# EAGLE board UART_Block-GiantPanel-v10 (EAGLE 6.6.0), part 1 of 13
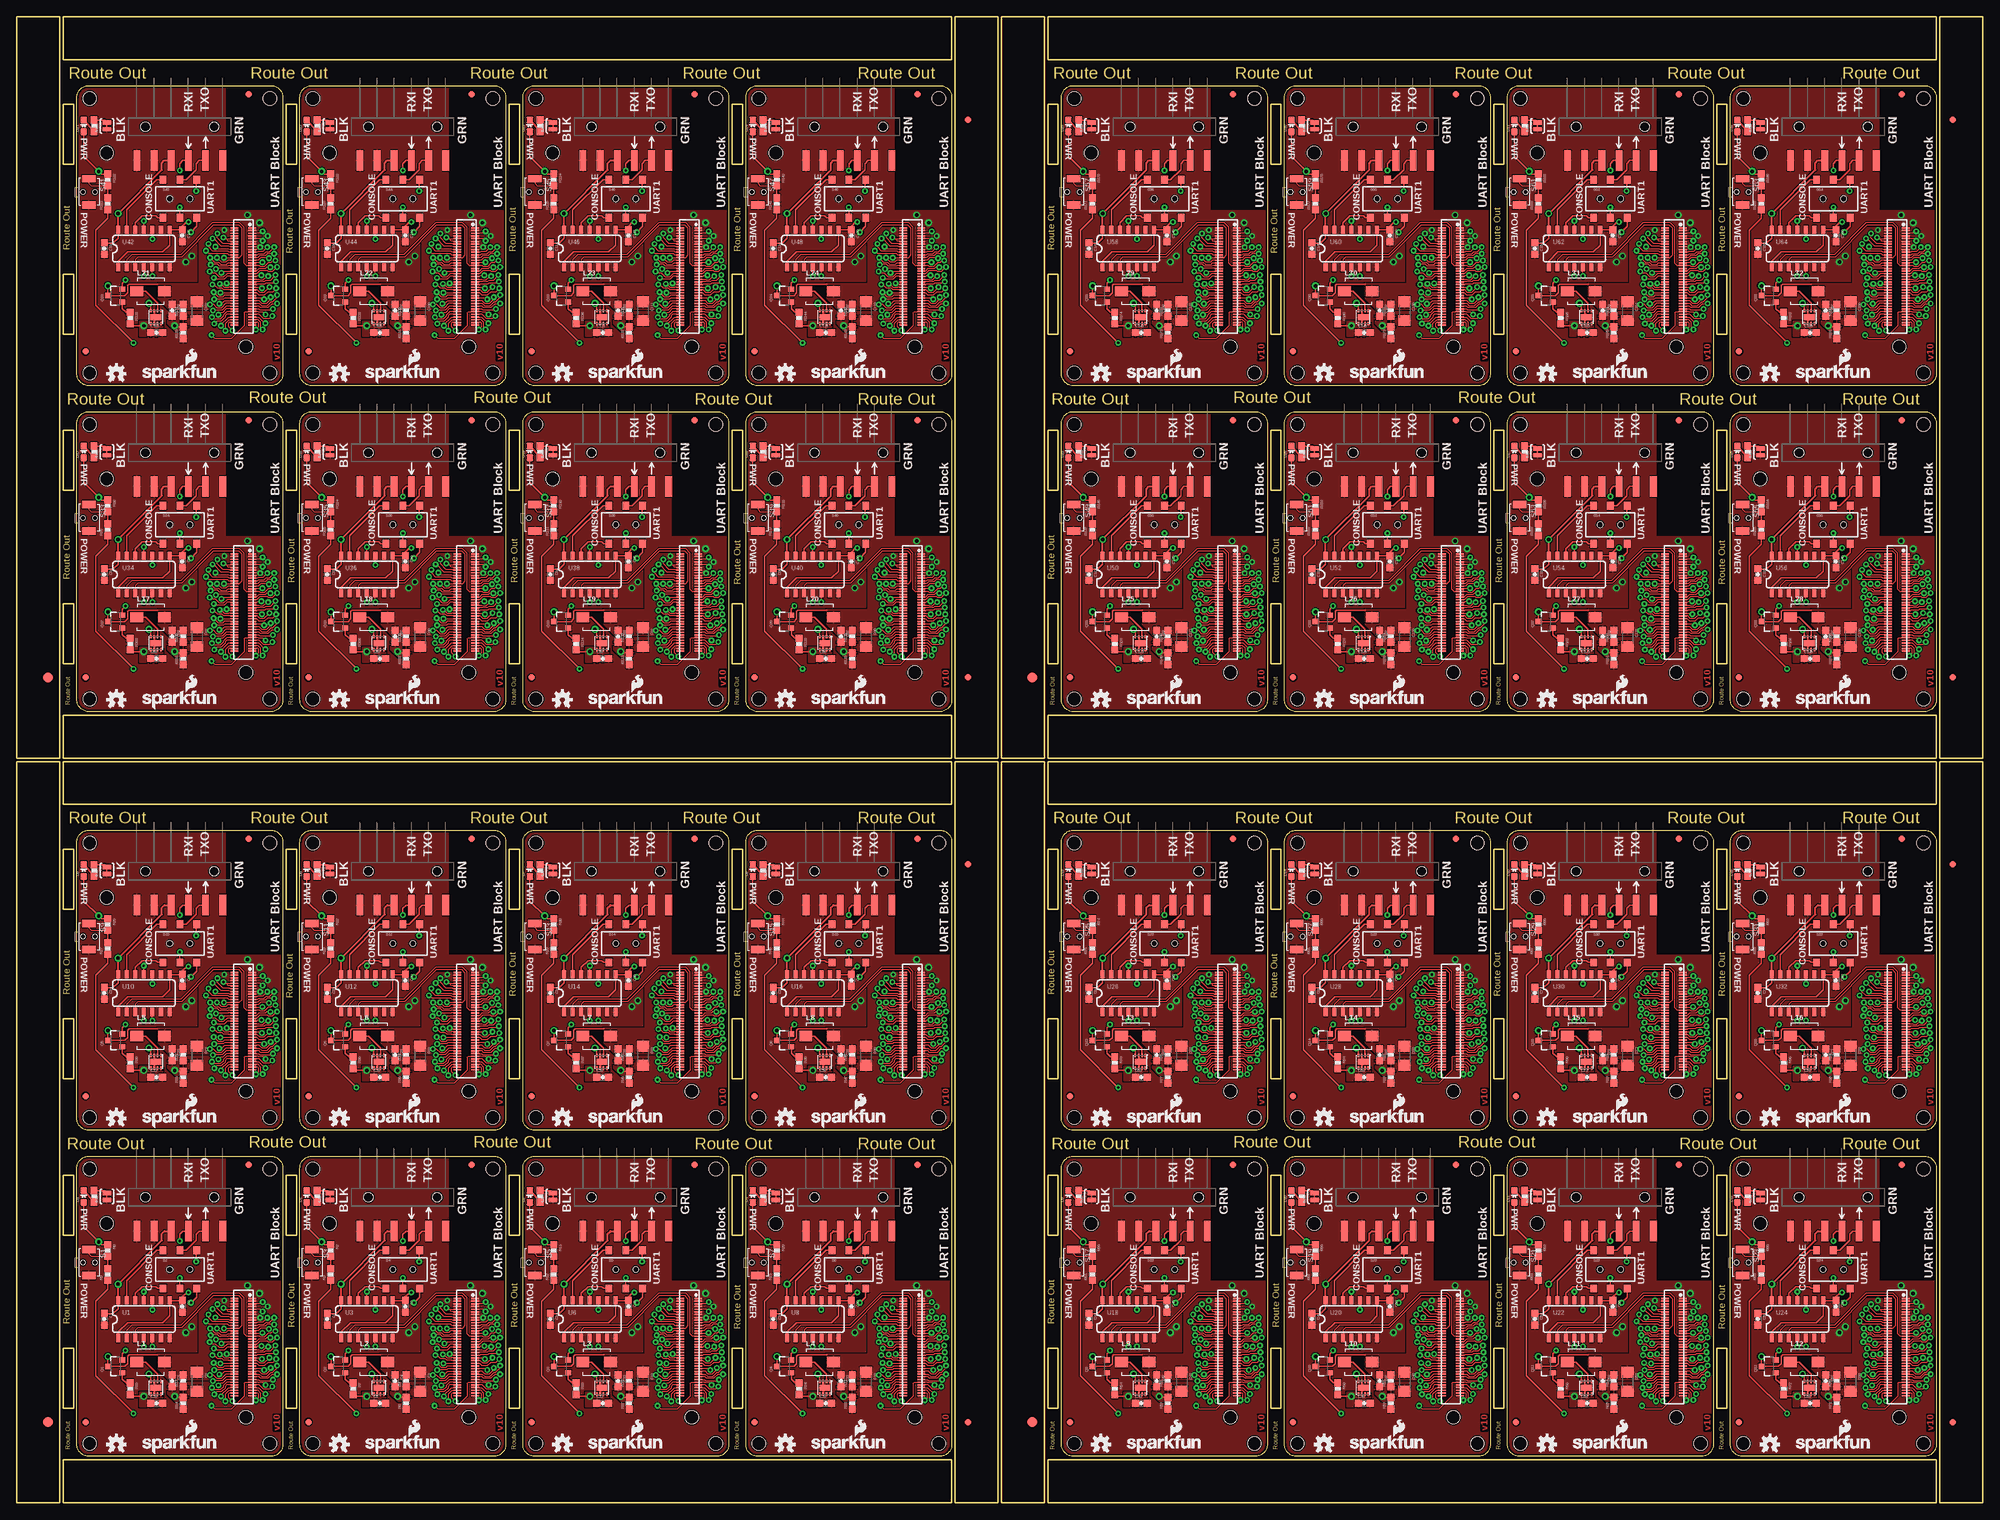
[diagram p0: board, top side]
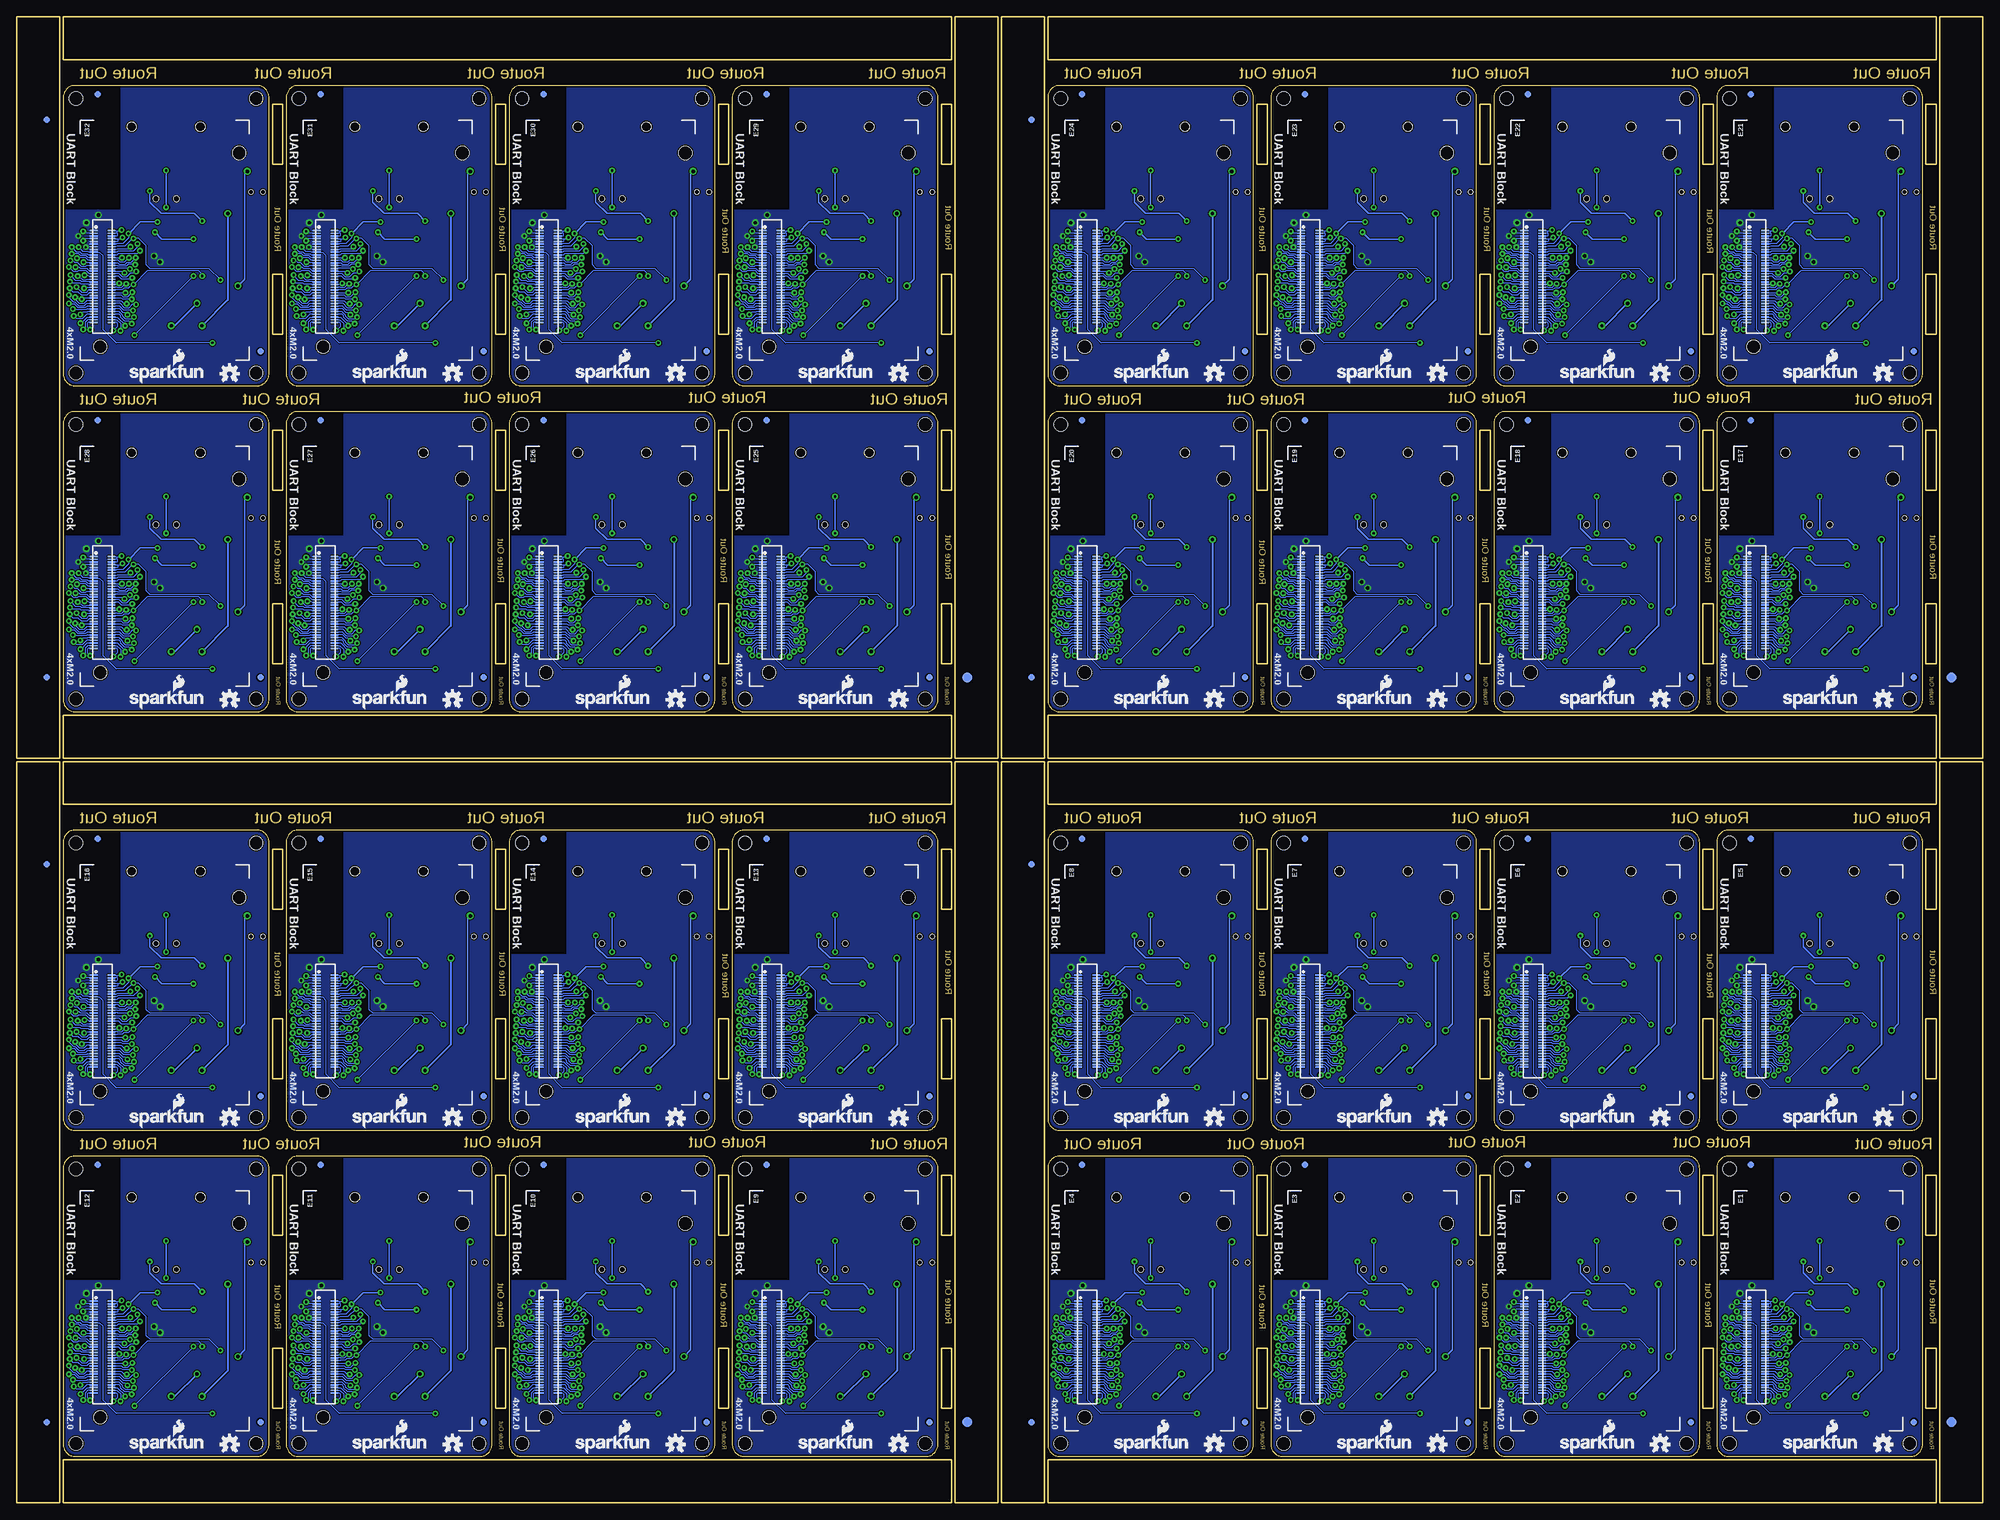
[diagram p1: board, bottom side, seen from below]

Size 291.08 x 219.96 mm. Coordinates in mm from the lower left corner, seen from the top.
Outline: 592 segments
Copper layers (1*16): Top 0.035mm / dielectric 1.5mm / Bottom 0.035mm
Design rules "SparkFun-2-layer *": minimum track width 6mil, minimum drill 13mil, track to track 6mil, track to pad 6mil, pad to pad 6mil, via to via 6mil, smd to smd 6mil, copper to edge 8mil, drill to drill 8mil, minimum pad ring 12mil, minimum via ring 10mil, stop-mask expansion 4mil, vias tented up to drill 20mil, thermal gap 6mil
Holes 2 mm at 37.47,8.76 10.79,8.76 10.79,49.4 37.47,49.4 70.48,8.76 43.81,8.76 43.81,49.4 70.48,49.4 103.5,8.76 76.83,8.76 76.83,49.4 103.5,49.4 136.53,8.76 109.86,8.76 109.86,49.4 136.53,49.4 37.47,57.02 10.79,57.02 10.79,97.66 37.47,97.66 70.48,57.02 43.81,57.02 43.81,97.66 70.48,97.66 103.5,57.02 76.83,57.02 76.83,97.66 103.5,97.66 136.53,57.02 109.86,57.02 109.86,97.66 136.53,97.66 183.26,8.76 156.59,8.76 156.59,49.4 183.26,49.4 216.28,8.76 189.61,8.76 189.61,49.4 216.28,49.4 249.3,8.76 222.63,8.76 222.63,49.4 249.3,49.4 282.32,8.76 255.65,8.76 255.65,49.4 282.32,49.4 183.26,57.02 156.59,57.02 156.59,97.66 183.26,97.66 216.28,57.02 189.61,57.02 189.61,97.66 216.28,97.66 249.3,57.02 222.63,57.02 222.63,97.66 249.3,97.66 282.32,57.02 255.65,57.02 255.65,97.66 282.32,97.66 37.47,119 10.79,119 10.79,159.64 37.47,159.64 70.48,119 43.81,119 43.81,159.64 70.48,159.64 103.5,119 76.83,119 76.83,159.64 103.5,159.64 136.53,119 109.86,119 109.86,159.64 136.53,159.64 37.47,167.26 10.79,167.26 10.79,207.9 37.47,207.9 70.48,167.26 43.81,167.26 43.81,207.9 70.48,207.9 103.5,167.26 76.83,167.26 76.83,207.9 103.5,207.9 136.53,167.26 109.86,167.26 109.86,207.9 136.53,207.9 183.26,119 156.59,119 156.59,159.64 183.26,159.64 216.28,119 189.61,119 189.61,159.64 216.28,159.64 249.3,119 222.63,119 222.63,159.64 249.3,159.64 282.32,119 255.65,119 255.65,159.64 282.32,159.64 183.26,167.26 156.59,167.26 156.59,207.9 183.26,207.9 216.28,167.26 189.61,167.26 189.61,207.9 216.28,207.9 249.3,167.26 222.63,167.26 222.63,207.9 249.3,207.9 282.32,167.26 255.65,167.26 255.65,207.9 282.32,207.9
tRestrict: area 31,33 to 39.4,51.3; area 64,33 to 72.4,51.3; area 97,33 to 105.4,51.3; area 130,33 to 138.4,51.3; area 31,81.3 to 39.4,99.6; area 64,81.3 to 72.4,99.6; area 97,81.3 to 105.4,99.6; area 130,81.3 to 138.4,99.6; area 176.8,33 to 185.2,51.3; area 209.8,33 to 218.2,51.3; area 242.8,33 to 251.2,51.3; area 275.8,33 to 284.2,51.3; 20 more areas; 96 lines
bRestrict: area 31,33 to 39.4,51.3; area 64,33 to 72.4,51.3; area 97,33 to 105.4,51.3; area 130,33 to 138.4,51.3; area 31,81.3 to 39.4,99.6; area 64,81.3 to 72.4,99.6; area 97,81.3 to 105.4,99.6; area 130,81.3 to 138.4,99.6; area 176.8,33 to 185.2,51.3; area 209.8,33 to 218.2,51.3; area 242.8,33 to 251.2,51.3; area 275.8,33 to 284.2,51.3; 20 more areas

## Footprints (pad centres in the part's own frame; a part is rotated, then mirrored left to right if it is on the bottom)
0603-CAP = smd 1.1 x 1: 1 -0.85,0; 2 0.85,0
1206 = smd 1.6 x 1.8: 1 -1.4,0; 2 1.4,0
LED-0603 = smd 1 x 1: A 0,-0.877; C 0,0.877
EDISON_DAUGHTER = smd 1.14 x 0.2: 1 1.98,19.17; 2 4.62,19.17; 3 1.98,18.77; 4 4.62,18.77; 5 1.98,18.37; 6 4.62,18.37; 7 1.98,17.97; 8 4.62,17.97; 9 1.98,17.57; 10 4.62,17.57; 11 1.98,17.17; 12 4.62,17.17; 13 1.98,16.77; 14 4.62,16.77; 15 1.98,16.37; 16 4.62,16.37; 17 1.98,15.97; 18 4.62,15.97; 19 1.98,15.57; 20 4.62,15.57; 21 1.98,15.17; 22 4.62,15.17; 23 1.98,14.77; 24 4.62,14.77; 25 1.98,14.37; 26 4.62,14.37; 27 1.98,13.97; 28 4.62,13.97; 29 1.98,13.57; 30 4.62,13.57; 31 1.98,13.17; 32 4.62,13.17; 33 1.98,12.77; 34 4.62,12.77; 35 1.98,12.37; 36 4.62,12.37; 37 1.98,11.97; 38 4.62,11.97; 39 1.98,11.57; 40 4.62,11.57; 41 1.98,11.17; 42 4.62,11.17; 43 1.98,10.77; 44 4.62,10.77; 45 1.98,10.37; 46 4.62,10.37; 47 1.98,9.97; 48 4.62,9.97; 49 1.98,9.57; 50 4.62,9.57; 51 1.98,9.17; 52 4.62,9.17; 53 1.98,8.77; 54 4.62,8.77; 55 1.98,8.37; 56 4.62,8.37; 57 1.98,7.97; 58 4.62,7.97; 59 1.98,7.57; 60 4.62,7.57; 61 1.98,7.17; 62 4.62,7.17; 63 1.98,6.77; 64 4.62,6.77; 65 1.98,6.37; 66 4.62,6.37; 67 1.98,5.97; 68 4.62,5.97; 69 1.98,5.57; 70 4.62,5.57 | hole 2: 23.53,30.67; 2.93,1.98
FIDUCIAL-1.5X3 = smd 1.5 x 1.5: 1 0,0
FIDUCIAL-1X2 = smd 1 x 1: 1 0,0
1X06-SMD = smd 1 x 3: 1 -6.35,5; 2 -3.81,5; 3 -1.27,5; 4 1.27,5; 5 3.81,5; 6 6.35,5 | hole 1.4: -5.08,0; 5.08,0
INDUCTOR-SRP4020 = smd 1.9 x 1.5: P$1 -2.05,0; P$2 2.05,0
SOT23-3 = smd 0.8 x 0.9: 1 -0.95,-1; 2 0.95,-1; 3 0,1.1
0603-RES = smd 1.1 x 1: 1 -0.85,0; 2 0.85,0
TACTILE_SWITCH-SMD-RIGHT-ANGLE = smd 1.1 x 2: 1 -1.95,0; 2 1.95,0 | hole 0.7: 0,0.9; 0,-0.9
AYZ0202 = smd 1 x 1.15: 1 -2.5,2.825; 2 0,2.825; 3 2.5,2.825; 4 -2.5,-2.825; 5 0,-2.825; 6 2.5,-2.825 | hole 0.85: 1.5,0; -1.5,0
PAD-JUMPER-2-NC_BY_TRACE_YES_SILK = smd 0.635 x 1.27: 1 -0.508,0; 2 0.508,0
SO14 = smd 0.6 x 1.2: 1 -3.81,-2.8; 2 -2.54,-2.8; 3 -1.27,-2.8; 4 0,-2.8; 5 1.27,-2.8; 6 2.54,-2.8; 7 3.81,-2.8; 8 3.81,2.8; 9 2.54,2.8; 10 1.27,2.8; 11 0,2.8; 12 -1.27,2.8; 13 -2.54,2.8; 14 -3.81,2.8
WSON-8-PAD = smd 0.25 x 0.5: 1 -0.75,-0.95; 2 -0.25,-0.95; 3 0.25,-0.95; 4 0.75,-0.95; 5 0.75,0.95; 6 0.25,0.95; 7 -0.25,0.95; 8 -0.75,0.95 | smd 1.6 x 0.9: PAD 0,0
DF40C-70DP-0.4(51) = smd 0.2 x 1.14 bottom: 1 6.8,1.32; 2 6.8,-1.32; 3 6.4,1.32; 4 6.4,-1.32; 5 6,1.32; 6 6,-1.32; 7 5.6,1.32; 8 5.6,-1.32; 9 5.2,1.32; 10 5.2,-1.32; 11 4.8,1.32; 12 4.8,-1.32; 13 4.4,1.32; 14 4.4,-1.32; 15 4,1.32; 16 4,-1.32; 17 3.6,1.32; 18 3.6,-1.32; 19 3.2,1.32; 20 3.2,-1.32; 21 2.8,1.32; 22 2.8,-1.32; 23 2.4,1.32; 24 2.4,-1.32; 25 2,1.32; 26 2,-1.32; 27 1.6,1.32; 28 1.6,-1.32; 29 1.2,1.32; 30 1.2,-1.32; 31 0.8,1.32; 32 0.8,-1.32; 33 0.4,1.32; 34 0.4,-1.32; 35 0,1.32; 36 0,-1.32; 37 -0.4,1.32; 38 -0.4,-1.32; 39 -0.8,1.32; 40 -0.8,-1.32; 41 -1.2,1.32; 42 -1.2,-1.32; 43 -1.6,1.32; 44 -1.6,-1.32; 45 -2,1.32; 46 -2,-1.32; 47 -2.4,1.32; 48 -2.4,-1.32; 49 -2.8,1.32; 50 -2.8,-1.32; 51 -3.2,1.32; 52 -3.2,-1.32; 53 -3.6,1.32; 54 -3.6,-1.32; 55 -4,1.32; 56 -4,-1.32; 57 -4.4,1.32; 58 -4.4,-1.32; 59 -4.8,1.32; 60 -4.8,-1.32; 61 -5.2,1.32; 62 -5.2,-1.32; 63 -5.6,1.32; 64 -5.6,-1.32; 65 -6,1.32; 66 -6,-1.32; 67 -6.4,1.32; 68 -6.4,-1.32; 69 -6.8,1.32; 70 -6.8,-1.32; NC1 7.2,1.32; NC2 7.2,-1.32; NC3 -7.2,-1.32; NC4 -7.2,1.32

## Placement (x,y rotation side)
C1  0.1uF  [0603-CAP]  12.95,27.18 270 top
C2  0.1uF  [0603-CAP]  24.51,29.08 270 top
C3  10uF  [1206]  59.69,17.91 270 top
C4  47pF  [0603-CAP]  56.01,18.03 270 top
C5  4.7uF  [0603-CAP]  53.72,14.73 0 top
C6  0.1uF  [0603-CAP]  45.97,27.18 270 top
C7  0.1uF  [0603-CAP]  57.53,29.08 270 top
C8  10uF  [1206]  26.67,17.91 270 top
C9  47pF  [0603-CAP]  22.99,18.03 270 top
C10  4.7uF  [0603-CAP]  20.7,14.73 0 top
C11  10uF  [1206]  92.71,17.91 270 top
C12  47pF  [0603-CAP]  89.03,18.03 270 top
C13  4.7uF  [0603-CAP]  86.74,14.73 0 top
C14  0.1uF  [0603-CAP]  78.99,27.18 270 top
C15  0.1uF  [0603-CAP]  90.55,29.08 270 top
C16  10uF  [1206]  125.73,17.91 270 top
C17  47pF  [0603-CAP]  122.05,18.03 270 top
C18  4.7uF  [0603-CAP]  119.76,14.73 0 top
C19  0.1uF  [0603-CAP]  112.01,27.18 270 top
C20  0.1uF  [0603-CAP]  123.57,29.08 270 top
C21  10uF  [1206]  26.67,66.17 270 top
C22  47pF  [0603-CAP]  22.99,66.29 270 top
C23  4.7uF  [0603-CAP]  20.7,62.99 0 top
C24  0.1uF  [0603-CAP]  12.95,75.44 270 top
C25  0.1uF  [0603-CAP]  24.51,77.34 270 top
C26  10uF  [1206]  59.69,66.17 270 top
C27  47pF  [0603-CAP]  56.01,66.29 270 top
C28  4.7uF  [0603-CAP]  53.72,62.99 0 top
C29  0.1uF  [0603-CAP]  45.97,75.44 270 top
C30  0.1uF  [0603-CAP]  57.53,77.34 270 top
C31  10uF  [1206]  92.71,66.17 270 top
C32  47pF  [0603-CAP]  89.03,66.29 270 top
C33  4.7uF  [0603-CAP]  86.74,62.99 0 top
C34  0.1uF  [0603-CAP]  78.99,75.44 270 top
C35  0.1uF  [0603-CAP]  90.55,77.34 270 top
C36  10uF  [1206]  125.73,66.17 270 top
C37  47pF  [0603-CAP]  122.05,66.29 270 top
C38  4.7uF  [0603-CAP]  119.76,62.99 0 top
C39  0.1uF  [0603-CAP]  112.01,75.44 270 top
C40  0.1uF  [0603-CAP]  123.57,77.34 270 top
C41  10uF  [1206]  172.47,17.91 270 top
C42  47pF  [0603-CAP]  168.78,18.03 270 top
C43  4.7uF  [0603-CAP]  166.5,14.73 0 top
C44  0.1uF  [0603-CAP]  158.75,27.18 270 top
C45  0.1uF  [0603-CAP]  170.31,29.08 270 top
C46  10uF  [1206]  205.49,17.91 270 top
C47  47pF  [0603-CAP]  201.8,18.03 270 top
C48  4.7uF  [0603-CAP]  199.52,14.73 0 top
C49  0.1uF  [0603-CAP]  191.77,27.18 270 top
C50  0.1uF  [0603-CAP]  203.33,29.08 270 top
C51  10uF  [1206]  238.51,17.91 270 top
C52  47pF  [0603-CAP]  234.82,18.03 270 top
C53  4.7uF  [0603-CAP]  232.54,14.73 0 top
C54  0.1uF  [0603-CAP]  224.79,27.18 270 top
C55  0.1uF  [0603-CAP]  236.35,29.08 270 top
C56  10uF  [1206]  271.53,17.91 270 top
C57  47pF  [0603-CAP]  267.84,18.03 270 top
C58  4.7uF  [0603-CAP]  265.56,14.73 0 top
C59  0.1uF  [0603-CAP]  257.81,27.18 270 top
C60  0.1uF  [0603-CAP]  269.37,29.08 270 top
C61  10uF  [1206]  172.47,66.17 270 top
C62  47pF  [0603-CAP]  168.78,66.29 270 top
C63  4.7uF  [0603-CAP]  166.5,62.99 0 top
C64  0.1uF  [0603-CAP]  158.75,75.44 270 top
C65  0.1uF  [0603-CAP]  170.31,77.34 270 top
C66  10uF  [1206]  205.49,66.17 270 top
C67  47pF  [0603-CAP]  201.8,66.29 270 top
C68  4.7uF  [0603-CAP]  199.52,62.99 0 top
C69  0.1uF  [0603-CAP]  191.77,75.44 270 top
C70  0.1uF  [0603-CAP]  203.33,77.34 270 top
C71  10uF  [1206]  238.51,66.17 270 top
C72  47pF  [0603-CAP]  234.82,66.29 270 top
C73  4.7uF  [0603-CAP]  232.54,62.99 0 top
C74  0.1uF  [0603-CAP]  224.79,75.44 270 top
C75  0.1uF  [0603-CAP]  236.35,77.34 270 top
C76  10uF  [1206]  271.53,66.17 270 top
C77  47pF  [0603-CAP]  267.84,66.29 270 top
C78  4.7uF  [0603-CAP]  265.56,62.99 0 top
C79  0.1uF  [0603-CAP]  257.81,75.44 270 top
C80  0.1uF  [0603-CAP]  269.37,77.34 270 top
C81  10uF  [1206]  26.67,128.14 270 top
C82  47pF  [0603-CAP]  22.99,128.27 270 top
C83  4.7uF  [0603-CAP]  20.7,124.97 0 top
C84  0.1uF  [0603-CAP]  12.95,137.41 270 top
C85  0.1uF  [0603-CAP]  24.51,139.32 270 top
C86  10uF  [1206]  59.69,128.14 270 top
C87  47pF  [0603-CAP]  56.01,128.27 270 top
C88  4.7uF  [0603-CAP]  53.72,124.97 0 top
C89  0.1uF  [0603-CAP]  45.97,137.41 270 top
C90  0.1uF  [0603-CAP]  57.53,139.32 270 top
C91  10uF  [1206]  92.71,128.14 270 top
C92  47pF  [0603-CAP]  89.03,128.27 270 top
C93  4.7uF  [0603-CAP]  86.74,124.97 0 top
C94  0.1uF  [0603-CAP]  78.99,137.41 270 top
C95  0.1uF  [0603-CAP]  90.55,139.32 270 top
C96  10uF  [1206]  125.73,128.14 270 top
C97  47pF  [0603-CAP]  122.05,128.27 270 top
C98  4.7uF  [0603-CAP]  119.76,124.97 0 top
C99  0.1uF  [0603-CAP]  112.01,137.41 270 top
C100  0.1uF  [0603-CAP]  123.57,139.32 270 top
C101  10uF  [1206]  26.67,176.4 270 top
C102  47pF  [0603-CAP]  22.99,176.53 270 top
C103  4.7uF  [0603-CAP]  20.7,173.23 0 top
C104  0.1uF  [0603-CAP]  12.95,185.67 270 top
C105  0.1uF  [0603-CAP]  24.51,187.58 270 top
C106  10uF  [1206]  59.69,176.4 270 top
C107  47pF  [0603-CAP]  56.01,176.53 270 top
C108  4.7uF  [0603-CAP]  53.72,173.23 0 top
C109  0.1uF  [0603-CAP]  45.97,185.67 270 top
C110  0.1uF  [0603-CAP]  57.53,187.58 270 top
C111  10uF  [1206]  92.71,176.4 270 top
C112  47pF  [0603-CAP]  89.03,176.53 270 top
C113  4.7uF  [0603-CAP]  86.74,173.23 0 top
C114  0.1uF  [0603-CAP]  78.99,185.67 270 top
C115  0.1uF  [0603-CAP]  90.55,187.58 270 top
C116  10uF  [1206]  125.73,176.4 270 top
C117  47pF  [0603-CAP]  122.05,176.53 270 top
C118  4.7uF  [0603-CAP]  119.76,173.23 0 top
C119  0.1uF  [0603-CAP]  112.01,185.67 270 top
C120  0.1uF  [0603-CAP]  123.57,187.58 270 top
C121  10uF  [1206]  172.47,128.14 270 top
C122  47pF  [0603-CAP]  168.78,128.27 270 top
C123  4.7uF  [0603-CAP]  166.5,124.97 0 top
C124  0.1uF  [0603-CAP]  158.75,137.41 270 top
C125  0.1uF  [0603-CAP]  170.31,139.32 270 top
C126  10uF  [1206]  205.49,128.14 270 top
C127  47pF  [0603-CAP]  201.8,128.27 270 top
C128  4.7uF  [0603-CAP]  199.52,124.97 0 top
C129  0.1uF  [0603-CAP]  191.77,137.41 270 top
C130  0.1uF  [0603-CAP]  203.33,139.32 270 top
C131  10uF  [1206]  238.51,128.14 270 top
C132  47pF  [0603-CAP]  234.82,128.27 270 top
C133  4.7uF  [0603-CAP]  232.54,124.97 0 top
C134  0.1uF  [0603-CAP]  224.79,137.41 270 top
C135  0.1uF  [0603-CAP]  236.35,139.32 270 top
C136  10uF  [1206]  271.53,128.14 270 top
C137  47pF  [0603-CAP]  267.84,128.27 270 top
C138  4.7uF  [0603-CAP]  265.56,124.97 0 top
C139  0.1uF  [0603-CAP]  257.81,137.41 270 top
C140  0.1uF  [0603-CAP]  269.37,139.32 270 top
C141  10uF  [1206]  172.47,176.4 270 top
C142  47pF  [0603-CAP]  168.78,176.53 270 top
C143  4.7uF  [0603-CAP]  166.5,173.23 0 top
C144  0.1uF  [0603-CAP]  158.75,185.67 270 top
C145  0.1uF  [0603-CAP]  170.31,187.58 270 top
C146  10uF  [1206]  205.49,176.4 270 top
C147  47pF  [0603-CAP]  201.8,176.53 270 top
C148  4.7uF  [0603-CAP]  199.52,173.23 0 top
C149  0.1uF  [0603-CAP]  191.77,185.67 270 top
C150  0.1uF  [0603-CAP]  203.33,187.58 270 top
C151  10uF  [1206]  238.51,176.4 270 top
C152  47pF  [0603-CAP]  234.82,176.53 270 top
C153  4.7uF  [0603-CAP]  232.54,173.23 0 top
C154  0.1uF  [0603-CAP]  224.79,185.67 270 top
C155  0.1uF  [0603-CAP]  236.35,187.58 270 top
C156  10uF  [1206]  271.53,176.4 270 top
C157  47pF  [0603-CAP]  267.84,176.53 270 top
C158  4.7uF  [0603-CAP]  265.56,173.23 0 top
C159  0.1uF  [0603-CAP]  257.81,185.67 270 top
C160  0.1uF  [0603-CAP]  269.37,187.58 270 top
D1  BLUE  [LED-0603]  42.93,45.34 0 top
D2  BLUE  [LED-0603]  75.95,45.34 0 top
D3  BLUE  [LED-0603]  9.91,45.34 0 top
D4  BLUE  [LED-0603]  108.97,45.34 0 top
D5  BLUE  [LED-0603]  9.91,93.6 0 top
D6  BLUE  [LED-0603]  42.93,93.6 0 top
D7  BLUE  [LED-0603]  75.95,93.6 0 top
D8  BLUE  [LED-0603]  108.97,93.6 0 top
D9  BLUE  [LED-0603]  155.7,45.34 0 top
D10  BLUE  [LED-0603]  188.72,45.34 0 top
D11  BLUE  [LED-0603]  221.74,45.34 0 top
D12  BLUE  [LED-0603]  254.76,45.34 0 top
D13  BLUE  [LED-0603]  155.7,93.6 0 top
D14  BLUE  [LED-0603]  188.72,93.6 0 top
D15  BLUE  [LED-0603]  221.74,93.6 0 top
D16  BLUE  [LED-0603]  254.76,93.6 0 top
D17  BLUE  [LED-0603]  9.91,155.57 0 top
D18  BLUE  [LED-0603]  42.93,155.57 0 top
D19  BLUE  [LED-0603]  75.95,155.57 0 top
D20  BLUE  [LED-0603]  108.97,155.57 0 top
D21  BLUE  [LED-0603]  9.91,203.84 0 top
D22  BLUE  [LED-0603]  42.93,203.84 0 top
D23  BLUE  [LED-0603]  75.95,203.84 0 top
D24  BLUE  [LED-0603]  108.97,203.84 0 top
D25  BLUE  [LED-0603]  155.7,155.57 0 top
D26  BLUE  [LED-0603]  188.72,155.57 0 top
D27  BLUE  [LED-0603]  221.74,155.57 0 top
D28  BLUE  [LED-0603]  254.76,155.57 0 top
D29  BLUE  [LED-0603]  155.7,203.84 0 top
D30  BLUE  [LED-0603]  188.72,203.84 0 top
D31  BLUE  [LED-0603]  221.74,203.84 0 top
D32  BLUE  [LED-0603]  254.76,203.84 0 top
E1  EDISON_CONNECTOR_FULLMOUNTING_HOLES  [EDISON_DAUGHTER]  36.83,10.67 0 bottom
E2  EDISON_CONNECTOR_FULLMOUNTING_HOLES  [EDISON_DAUGHTER]  69.85,10.67 0 bottom
E3  EDISON_CONNECTOR_FULLMOUNTING_HOLES  [EDISON_DAUGHTER]  102.87,10.67 0 bottom
E4  EDISON_CONNECTOR_FULLMOUNTING_HOLES  [EDISON_DAUGHTER]  135.89,10.67 0 bottom
E5  EDISON_CONNECTOR_FULLMOUNTING_HOLES  [EDISON_DAUGHTER]  36.83,58.93 0 bottom
E6  EDISON_CONNECTOR_FULLMOUNTING_HOLES  [EDISON_DAUGHTER]  69.85,58.93 0 bottom
E7  EDISON_CONNECTOR_FULLMOUNTING_HOLES  [EDISON_DAUGHTER]  102.87,58.93 0 bottom
E8  EDISON_CONNECTOR_FULLMOUNTING_HOLES  [EDISON_DAUGHTER]  135.89,58.93 0 bottom
E9  EDISON_CONNECTOR_FULLMOUNTING_HOLES  [EDISON_DAUGHTER]  182.63,10.67 0 bottom
E10  EDISON_CONNECTOR_FULLMOUNTING_HOLES  [EDISON_DAUGHTER]  215.65,10.67 0 bottom
E11  EDISON_CONNECTOR_FULLMOUNTING_HOLES  [EDISON_DAUGHTER]  248.67,10.67 0 bottom
E12  EDISON_CONNECTOR_FULLMOUNTING_HOLES  [EDISON_DAUGHTER]  281.69,10.67 0 bottom
E13  EDISON_CONNECTOR_FULLMOUNTING_HOLES  [EDISON_DAUGHTER]  182.63,58.93 0 bottom
E14  EDISON_CONNECTOR_FULLMOUNTING_HOLES  [EDISON_DAUGHTER]  215.65,58.93 0 bottom
E15  EDISON_CONNECTOR_FULLMOUNTING_HOLES  [EDISON_DAUGHTER]  248.67,58.93 0 bottom
E16  EDISON_CONNECTOR_FULLMOUNTING_HOLES  [EDISON_DAUGHTER]  281.69,58.93 0 bottom
E17  EDISON_CONNECTOR_FULLMOUNTING_HOLES  [EDISON_DAUGHTER]  36.83,120.9 0 bottom
E18  EDISON_CONNECTOR_FULLMOUNTING_HOLES  [EDISON_DAUGHTER]  69.85,120.9 0 bottom
E19  EDISON_CONNECTOR_FULLMOUNTING_HOLES  [EDISON_DAUGHTER]  102.87,120.9 0 bottom
E20  EDISON_CONNECTOR_FULLMOUNTING_HOLES  [EDISON_DAUGHTER]  135.89,120.9 0 bottom
E21  EDISON_CONNECTOR_FULLMOUNTING_HOLES  [EDISON_DAUGHTER]  36.83,169.16 0 bottom
E22  EDISON_CONNECTOR_FULLMOUNTING_HOLES  [EDISON_DAUGHTER]  69.85,169.16 0 bottom
E23  EDISON_CONNECTOR_FULLMOUNTING_HOLES  [EDISON_DAUGHTER]  102.87,169.16 0 bottom
E24  EDISON_CONNECTOR_FULLMOUNTING_HOLES  [EDISON_DAUGHTER]  135.89,169.16 0 bottom
E25  EDISON_CONNECTOR_FULLMOUNTING_HOLES  [EDISON_DAUGHTER]  182.63,120.9 0 bottom
E26  EDISON_CONNECTOR_FULLMOUNTING_HOLES  [EDISON_DAUGHTER]  215.65,120.9 0 bottom
E27  EDISON_CONNECTOR_FULLMOUNTING_HOLES  [EDISON_DAUGHTER]  248.67,120.9 0 bottom
E28  EDISON_CONNECTOR_FULLMOUNTING_HOLES  [EDISON_DAUGHTER]  281.69,120.9 0 bottom
E29  EDISON_CONNECTOR_FULLMOUNTING_HOLES  [EDISON_DAUGHTER]  182.63,169.16 0 bottom
E30  EDISON_CONNECTOR_FULLMOUNTING_HOLES  [EDISON_DAUGHTER]  215.65,169.16 0 bottom
E31  EDISON_CONNECTOR_FULLMOUNTING_HOLES  [EDISON_DAUGHTER]  248.67,169.16 0 bottom
E32  EDISON_CONNECTOR_FULLMOUNTING_HOLES  [EDISON_DAUGHTER]  281.69,169.16 0 bottom
E$1  [FIDUCIAL-1.5X3]  4.57,11.94 0 top
E$2  [FIDUCIAL-1.5X3]  4.57,11.94 0 bottom
E$3  [FIDUCIAL-1X2]  140.84,94.49 180 bottom
E$4  [FIDUCIAL-1X2]  140.84,11.94 0 top
E$5  [FIDUCIAL-1X2]  140.84,94.49 180 top
E$6  [FIDUCIAL-1X2]  140.84,11.94 0 bottom
E$7  [FIDUCIAL-1X2]  286.64,11.94 0 top
E$8  [FIDUCIAL-1X2]  286.64,94.49 180 top
E$9  [FIDUCIAL-1.5X3]  150.37,11.94 0 top
E$10  [FIDUCIAL-1.5X3]  150.37,11.94 0 bottom
E$11  [FIDUCIAL-1X2]  286.64,94.49 180 bottom
E$12  [FIDUCIAL-1X2]  286.64,11.94 0 bottom
E$13  [FIDUCIAL-1X2]  140.84,122.17 0 top
E$14  [FIDUCIAL-1X2]  140.84,204.72 180 top
E$15  [FIDUCIAL-1.5X3]  4.57,122.17 0 top
E$16  [FIDUCIAL-1.5X3]  4.57,122.17 0 bottom
E$17  [FIDUCIAL-1X2]  140.84,204.72 180 bottom
E$18  [FIDUCIAL-1X2]  140.84,122.17 0 bottom
E$19  [FIDUCIAL-1X2]  286.64,122.17 0 top
E$20  [FIDUCIAL-1X2]  286.64,204.72 180 top
E$21  [FIDUCIAL-1.5X3]  150.37,122.17 0 top
E$22  [FIDUCIAL-1.5X3]  150.37,122.17 0 bottom
E$23  [FIDUCIAL-1X2]  286.64,204.72 180 bottom
E$24  [FIDUCIAL-1X2]  286.64,122.17 0 bottom
FID1  FIDUCIAL1X2  [FIDUCIAL-1X2]  34.29,50.04 0 top
FID2  FIDUCIAL1X2  [FIDUCIAL-1X2]  10.16,11.94 0 top
FID3  FIDUCIAL1X2  [FIDUCIAL-1X2]  10.16,11.94 0 bottom
FID4  FIDUCIAL1X2  [FIDUCIAL-1X2]  34.29,50.04 0 bottom
FID5  FIDUCIAL1X2  [FIDUCIAL-1X2]  67.31,50.04 0 top
FID6  FIDUCIAL1X2  [FIDUCIAL-1X2]  43.18,11.94 0 top
FID7  FIDUCIAL1X2  [FIDUCIAL-1X2]  43.18,11.94 0 bottom
FID8  FIDUCIAL1X2  [FIDUCIAL-1X2]  67.31,50.04 0 bottom
FID9  FIDUCIAL1X2  [FIDUCIAL-1X2]  100.33,50.04 0 top
FID10  FIDUCIAL1X2  [FIDUCIAL-1X2]  76.2,11.94 0 top
FID11  FIDUCIAL1X2  [FIDUCIAL-1X2]  76.2,11.94 0 bottom
FID12  FIDUCIAL1X2  [FIDUCIAL-1X2]  100.33,50.04 0 bottom
FID13  FIDUCIAL1X2  [FIDUCIAL-1X2]  133.35,50.04 0 top
FID14  FIDUCIAL1X2  [FIDUCIAL-1X2]  109.22,11.94 0 top
FID15  FIDUCIAL1X2  [FIDUCIAL-1X2]  109.22,11.94 0 bottom
FID16  FIDUCIAL1X2  [FIDUCIAL-1X2]  133.35,50.04 0 bottom
FID17  FIDUCIAL1X2  [FIDUCIAL-1X2]  34.29,98.3 0 top
FID18  FIDUCIAL1X2  [FIDUCIAL-1X2]  10.16,60.2 0 top
FID19  FIDUCIAL1X2  [FIDUCIAL-1X2]  10.16,60.2 0 bottom
FID20  FIDUCIAL1X2  [FIDUCIAL-1X2]  34.29,98.3 0 bottom
FID21  FIDUCIAL1X2  [FIDUCIAL-1X2]  67.31,98.3 0 top
FID22  FIDUCIAL1X2  [FIDUCIAL-1X2]  43.18,60.2 0 top
FID23  FIDUCIAL1X2  [FIDUCIAL-1X2]  43.18,60.2 0 bottom
FID24  FIDUCIAL1X2  [FIDUCIAL-1X2]  67.31,98.3 0 bottom
FID25  FIDUCIAL1X2  [FIDUCIAL-1X2]  100.33,98.3 0 top
FID26  FIDUCIAL1X2  [FIDUCIAL-1X2]  76.2,60.2 0 top
FID27  FIDUCIAL1X2  [FIDUCIAL-1X2]  76.2,60.2 0 bottom
FID28  FIDUCIAL1X2  [FIDUCIAL-1X2]  100.33,98.3 0 bottom
FID29  FIDUCIAL1X2  [FIDUCIAL-1X2]  133.35,98.3 0 top
FID30  FIDUCIAL1X2  [FIDUCIAL-1X2]  109.22,60.2 0 top
FID31  FIDUCIAL1X2  [FIDUCIAL-1X2]  109.22,60.2 0 bottom
FID32  FIDUCIAL1X2  [FIDUCIAL-1X2]  133.35,98.3 0 bottom
FID33  FIDUCIAL1X2  [FIDUCIAL-1X2]  180.09,50.04 0 top
FID34  FIDUCIAL1X2  [FIDUCIAL-1X2]  155.96,11.94 0 top
FID35  FIDUCIAL1X2  [FIDUCIAL-1X2]  155.96,11.94 0 bottom
FID36  FIDUCIAL1X2  [FIDUCIAL-1X2]  180.09,50.04 0 bottom
FID37  FIDUCIAL1X2  [FIDUCIAL-1X2]  213.11,50.04 0 top
FID38  FIDUCIAL1X2  [FIDUCIAL-1X2]  188.98,11.94 0 top
FID39  FIDUCIAL1X2  [FIDUCIAL-1X2]  188.98,11.94 0 bottom
FID40  FIDUCIAL1X2  [FIDUCIAL-1X2]  213.11,50.04 0 bottom
FID41  FIDUCIAL1X2  [FIDUCIAL-1X2]  246.13,50.04 0 top
FID42  FIDUCIAL1X2  [FIDUCIAL-1X2]  222,11.94 0 top
FID43  FIDUCIAL1X2  [FIDUCIAL-1X2]  222,11.94 0 bottom
FID44  FIDUCIAL1X2  [FIDUCIAL-1X2]  246.13,50.04 0 bottom
FID45  FIDUCIAL1X2  [FIDUCIAL-1X2]  279.15,50.04 0 top
FID46  FIDUCIAL1X2  [FIDUCIAL-1X2]  255.02,11.94 0 top
FID47  FIDUCIAL1X2  [FIDUCIAL-1X2]  255.02,11.94 0 bottom
FID48  FIDUCIAL1X2  [FIDUCIAL-1X2]  279.15,50.04 0 bottom
FID49  FIDUCIAL1X2  [FIDUCIAL-1X2]  180.09,98.3 0 top
FID50  FIDUCIAL1X2  [FIDUCIAL-1X2]  155.96,60.2 0 top
FID51  FIDUCIAL1X2  [FIDUCIAL-1X2]  155.96,60.2 0 bottom
FID52  FIDUCIAL1X2  [FIDUCIAL-1X2]  180.09,98.3 0 bottom
FID53  FIDUCIAL1X2  [FIDUCIAL-1X2]  213.11,98.3 0 top
FID54  FIDUCIAL1X2  [FIDUCIAL-1X2]  188.98,60.2 0 top
FID55  FIDUCIAL1X2  [FIDUCIAL-1X2]  188.98,60.2 0 bottom
FID56  FIDUCIAL1X2  [FIDUCIAL-1X2]  213.11,98.3 0 bottom
FID57  FIDUCIAL1X2  [FIDUCIAL-1X2]  246.13,98.3 0 top
FID58  FIDUCIAL1X2  [FIDUCIAL-1X2]  222,60.2 0 top
FID59  FIDUCIAL1X2  [FIDUCIAL-1X2]  222,60.2 0 bottom
FID60  FIDUCIAL1X2  [FIDUCIAL-1X2]  246.13,98.3 0 bottom
FID61  FIDUCIAL1X2  [FIDUCIAL-1X2]  279.15,98.3 0 top
FID62  FIDUCIAL1X2  [FIDUCIAL-1X2]  255.02,60.2 0 top
FID63  FIDUCIAL1X2  [FIDUCIAL-1X2]  255.02,60.2 0 bottom
FID64  FIDUCIAL1X2  [FIDUCIAL-1X2]  279.15,98.3 0 bottom
FID65  FIDUCIAL1X2  [FIDUCIAL-1X2]  34.29,160.27 0 top
FID66  FIDUCIAL1X2  [FIDUCIAL-1X2]  10.16,122.17 0 top
FID67  FIDUCIAL1X2  [FIDUCIAL-1X2]  10.16,122.17 0 bottom
FID68  FIDUCIAL1X2  [FIDUCIAL-1X2]  34.29,160.27 0 bottom
FID69  FIDUCIAL1X2  [FIDUCIAL-1X2]  67.31,160.27 0 top
FID70  FIDUCIAL1X2  [FIDUCIAL-1X2]  43.18,122.17 0 top
FID71  FIDUCIAL1X2  [FIDUCIAL-1X2]  43.18,122.17 0 bottom
FID72  FIDUCIAL1X2  [FIDUCIAL-1X2]  67.31,160.27 0 bottom
FID73  FIDUCIAL1X2  [FIDUCIAL-1X2]  100.33,160.27 0 top
FID74  FIDUCIAL1X2  [FIDUCIAL-1X2]  76.2,122.17 0 top
FID75  FIDUCIAL1X2  [FIDUCIAL-1X2]  76.2,122.17 0 bottom
FID76  FIDUCIAL1X2  [FIDUCIAL-1X2]  100.33,160.27 0 bottom
FID77  FIDUCIAL1X2  [FIDUCIAL-1X2]  133.35,160.27 0 top
FID78  FIDUCIAL1X2  [FIDUCIAL-1X2]  109.22,122.17 0 top
FID79  FIDUCIAL1X2  [FIDUCIAL-1X2]  109.22,122.17 0 bottom
FID80  FIDUCIAL1X2  [FIDUCIAL-1X2]  133.35,160.27 0 bottom
FID81  FIDUCIAL1X2  [FIDUCIAL-1X2]  34.29,208.53 0 top
FID82  FIDUCIAL1X2  [FIDUCIAL-1X2]  10.16,170.43 0 top
FID83  FIDUCIAL1X2  [FIDUCIAL-1X2]  10.16,170.43 0 bottom
FID84  FIDUCIAL1X2  [FIDUCIAL-1X2]  34.29,208.53 0 bottom
FID85  FIDUCIAL1X2  [FIDUCIAL-1X2]  67.31,208.53 0 top
FID86  FIDUCIAL1X2  [FIDUCIAL-1X2]  43.18,170.43 0 top
FID87  FIDUCIAL1X2  [FIDUCIAL-1X2]  43.18,170.43 0 bottom
FID88  FIDUCIAL1X2  [FIDUCIAL-1X2]  67.31,208.53 0 bottom
FID89  FIDUCIAL1X2  [FIDUCIAL-1X2]  100.33,208.53 0 top
FID90  FIDUCIAL1X2  [FIDUCIAL-1X2]  76.2,170.43 0 top
FID91  FIDUCIAL1X2  [FIDUCIAL-1X2]  76.2,170.43 0 bottom
FID92  FIDUCIAL1X2  [FIDUCIAL-1X2]  100.33,208.53 0 bottom
FID93  FIDUCIAL1X2  [FIDUCIAL-1X2]  133.35,208.53 0 top
FID94  FIDUCIAL1X2  [FIDUCIAL-1X2]  109.22,170.43 0 top
FID95  FIDUCIAL1X2  [FIDUCIAL-1X2]  109.22,170.43 0 bottom
FID96  FIDUCIAL1X2  [FIDUCIAL-1X2]  133.35,208.53 0 bottom
FID97  FIDUCIAL1X2  [FIDUCIAL-1X2]  180.09,160.27 0 top
FID98  FIDUCIAL1X2  [FIDUCIAL-1X2]  155.96,122.17 0 top
FID99  FIDUCIAL1X2  [FIDUCIAL-1X2]  155.96,122.17 0 bottom
FID100  FIDUCIAL1X2  [FIDUCIAL-1X2]  180.09,160.27 0 bottom
FID101  FIDUCIAL1X2  [FIDUCIAL-1X2]  213.11,160.27 0 top
FID102  FIDUCIAL1X2  [FIDUCIAL-1X2]  188.98,122.17 0 top
FID103  FIDUCIAL1X2  [FIDUCIAL-1X2]  188.98,122.17 0 bottom
FID104  FIDUCIAL1X2  [FIDUCIAL-1X2]  213.11,160.27 0 bottom
FID105  FIDUCIAL1X2  [FIDUCIAL-1X2]  246.13,160.27 0 top
FID106  FIDUCIAL1X2  [FIDUCIAL-1X2]  222,122.17 0 top
FID107  FIDUCIAL1X2  [FIDUCIAL-1X2]  222,122.17 0 bottom
FID108  FIDUCIAL1X2  [FIDUCIAL-1X2]  246.13,160.27 0 bottom
FID109  FIDUCIAL1X2  [FIDUCIAL-1X2]  279.15,160.27 0 top
FID110  FIDUCIAL1X2  [FIDUCIAL-1X2]  255.02,122.17 0 top
FID111  FIDUCIAL1X2  [FIDUCIAL-1X2]  255.02,122.17 0 bottom
FID112  FIDUCIAL1X2  [FIDUCIAL-1X2]  279.15,160.27 0 bottom
FID113  FIDUCIAL1X2  [FIDUCIAL-1X2]  180.09,208.53 0 top
FID114  FIDUCIAL1X2  [FIDUCIAL-1X2]  155.96,170.43 0 top
FID115  FIDUCIAL1X2  [FIDUCIAL-1X2]  155.96,170.43 0 bottom
FID116  FIDUCIAL1X2  [FIDUCIAL-1X2]  180.09,208.53 0 bottom
FID117  FIDUCIAL1X2  [FIDUCIAL-1X2]  213.11,208.53 0 top
FID118  FIDUCIAL1X2  [FIDUCIAL-1X2]  188.98,170.43 0 top
FID119  FIDUCIAL1X2  [FIDUCIAL-1X2]  188.98,170.43 0 bottom
FID120  FIDUCIAL1X2  [FIDUCIAL-1X2]  213.11,208.53 0 bottom
FID121  FIDUCIAL1X2  [FIDUCIAL-1X2]  246.13,208.53 0 top
FID122  FIDUCIAL1X2  [FIDUCIAL-1X2]  222,170.43 0 top
FID123  FIDUCIAL1X2  [FIDUCIAL-1X2]  222,170.43 0 bottom
FID124  FIDUCIAL1X2  [FIDUCIAL-1X2]  246.13,208.53 0 bottom
FID125  FIDUCIAL1X2  [FIDUCIAL-1X2]  279.15,208.53 0 top
FID126  FIDUCIAL1X2  [FIDUCIAL-1X2]  255.02,170.43 0 top
FID127  FIDUCIAL1X2  [FIDUCIAL-1X2]  255.02,170.43 0 bottom
FID128  FIDUCIAL1X2  [FIDUCIAL-1X2]  279.15,208.53 0 bottom
JP1  [1X06-SMD]  57.15,45.21 180 top
JP2  [1X06-SMD]  24.13,45.21 180 top
JP3  [1X06-SMD]  90.17,45.21 180 top
JP4  [1X06-SMD]  123.19,45.21 180 top
JP5  [1X06-SMD]  24.13,93.47 180 top
JP6  [1X06-SMD]  57.15,93.47 180 top
JP7  [1X06-SMD]  90.17,93.47 180 top
JP8  [1X06-SMD]  123.19,93.47 180 top
JP9  [1X06-SMD]  169.93,45.21 180 top
JP10  [1X06-SMD]  202.95,45.21 180 top
JP11  [1X06-SMD]  235.97,45.21 180 top
JP12  [1X06-SMD]  268.99,45.21 180 top
JP13  [1X06-SMD]  169.93,93.47 180 top
JP14  [1X06-SMD]  202.95,93.47 180 top
JP15  [1X06-SMD]  235.97,93.47 180 top
JP16  [1X06-SMD]  268.99,93.47 180 top
JP17  [1X06-SMD]  24.13,155.45 180 top
JP18  [1X06-SMD]  57.15,155.45 180 top
JP19  [1X06-SMD]  90.17,155.45 180 top
JP20  [1X06-SMD]  123.19,155.45 180 top
JP21  [1X06-SMD]  24.13,203.71 180 top
JP22  [1X06-SMD]  57.15,203.71 180 top
JP23  [1X06-SMD]  90.17,203.71 180 top
JP24  [1X06-SMD]  123.19,203.71 180 top
JP25  [1X06-SMD]  169.93,155.45 180 top
JP26  [1X06-SMD]  202.95,155.45 180 top
JP27  [1X06-SMD]  235.97,155.45 180 top
JP28  [1X06-SMD]  268.99,155.45 180 top
JP29  [1X06-SMD]  169.93,203.71 180 top
JP30  [1X06-SMD]  202.95,203.71 180 top
JP31  [1X06-SMD]  235.97,203.71 180 top
JP32  [1X06-SMD]  268.99,203.71 180 top
L1  [INDUCTOR-SRP4020]  19.81,20.83 0 top
L2  [INDUCTOR-SRP4020]  52.83,20.83 0 top
L3  [INDUCTOR-SRP4020]  85.85,20.83 0 top
L4  [INDUCTOR-SRP4020]  118.87,20.83 0 top
L5  [INDUCTOR-SRP4020]  19.81,69.09 0 top
L6  [INDUCTOR-SRP4020]  52.83,69.09 0 top
L7  [INDUCTOR-SRP4020]  85.85,69.09 0 top
L8  [INDUCTOR-SRP4020]  118.87,69.09 0 top
L9  [INDUCTOR-SRP4020]  165.61,20.83 0 top
L10  [INDUCTOR-SRP4020]  198.63,20.83 0 top
L11  [INDUCTOR-SRP4020]  231.65,20.83 0 top
L12  [INDUCTOR-SRP4020]  264.67,20.83 0 top
L13  [INDUCTOR-SRP4020]  165.61,69.09 0 top
L14  [INDUCTOR-SRP4020]  198.63,69.09 0 top
L15  [INDUCTOR-SRP4020]  231.65,69.09 0 top
L16  [INDUCTOR-SRP4020]  264.67,69.09 0 top
L17  [INDUCTOR-SRP4020]  19.81,131.06 0 top
L18  [INDUCTOR-SRP4020]  52.83,131.06 0 top
L19  [INDUCTOR-SRP4020]  85.85,131.06 0 top
L20  [INDUCTOR-SRP4020]  118.87,131.06 0 top
L21  [INDUCTOR-SRP4020]  19.81,179.32 0 top
L22  [INDUCTOR-SRP4020]  52.83,179.32 0 top
L23  [INDUCTOR-SRP4020]  85.85,179.32 0 top
L24  [INDUCTOR-SRP4020]  118.87,179.32 0 top
L25  [INDUCTOR-SRP4020]  165.61,131.06 0 top
L26  [INDUCTOR-SRP4020]  198.63,131.06 0 top
L27  [INDUCTOR-SRP4020]  231.65,131.06 0 top
L28  [INDUCTOR-SRP4020]  264.67,131.06 0 top
L29  [INDUCTOR-SRP4020]  165.61,179.32 0 top
L30  [INDUCTOR-SRP4020]  198.63,179.32 0 top
L31  [INDUCTOR-SRP4020]  231.65,179.32 0 top
L32  [INDUCTOR-SRP4020]  264.67,179.32 0 top
LOGO1  SFE_LOGO_NAME_FLAME.1_INCH  [SFE_LOGO_NAME_FLAME_.1]  18.16,7.11 0 top
LOGO2  OSHW-LOGOS  [OSHW-LOGO-S]  14.73,8.64 0 bottom
LOGO3  SFE_LOGO_NAME_FLAME.1_INCH  [SFE_LOGO_NAME_FLAME_.1]  29.97,7.11 0 bottom
LOGO4  OSHW-LOGOS  [OSHW-LOGO-S]  14.73,8.64 0 top
LOGO5  OSHW-LOGOS  [OSHW-LOGO-S]  47.75,8.64 0 bottom
LOGO6  SFE_LOGO_NAME_FLAME.1_INCH  [SFE_LOGO_NAME_FLAME_.1]  62.99,7.11 0 bottom
LOGO7  SFE_LOGO_NAME_FLAME.1_INCH  [SFE_LOGO_NAME_FLAME_.1]  51.18,7.11 0 top
LOGO8  OSHW-LOGOS  [OSHW-LOGO-S]  47.75,8.64 0 top
LOGO9  OSHW-LOGOS  [OSHW-LOGO-S]  80.77,8.64 0 bottom
LOGO10  SFE_LOGO_NAME_FLAME.1_INCH  [SFE_LOGO_NAME_FLAME_.1]  96.01,7.11 0 bottom
LOGO11  SFE_LOGO_NAME_FLAME.1_INCH  [SFE_LOGO_NAME_FLAME_.1]  84.2,7.11 0 top
LOGO12  OSHW-LOGOS  [OSHW-LOGO-S]  80.77,8.64 0 top
LOGO13  OSHW-LOGOS  [OSHW-LOGO-S]  113.79,8.64 0 bottom
LOGO14  SFE_LOGO_NAME_FLAME.1_INCH  [SFE_LOGO_NAME_FLAME_.1]  129.03,7.11 0 bottom
LOGO15  SFE_LOGO_NAME_FLAME.1_INCH  [SFE_LOGO_NAME_FLAME_.1]  117.22,7.11 0 top
LOGO16  OSHW-LOGOS  [OSHW-LOGO-S]  113.79,8.64 0 top
LOGO17  OSHW-LOGOS  [OSHW-LOGO-S]  14.73,56.9 0 bottom
LOGO18  SFE_LOGO_NAME_FLAME.1_INCH  [SFE_LOGO_NAME_FLAME_.1]  29.97,55.37 0 bottom
LOGO19  SFE_LOGO_NAME_FLAME.1_INCH  [SFE_LOGO_NAME_FLAME_.1]  18.16,55.37 0 top
LOGO20  OSHW-LOGOS  [OSHW-LOGO-S]  14.73,56.9 0 top
LOGO21  OSHW-LOGOS  [OSHW-LOGO-S]  47.75,56.9 0 bottom
LOGO22  SFE_LOGO_NAME_FLAME.1_INCH  [SFE_LOGO_NAME_FLAME_.1]  62.99,55.37 0 bottom
LOGO23  SFE_LOGO_NAME_FLAME.1_INCH  [SFE_LOGO_NAME_FLAME_.1]  51.18,55.37 0 top
LOGO24  OSHW-LOGOS  [OSHW-LOGO-S]  47.75,56.9 0 top
LOGO25  OSHW-LOGOS  [OSHW-LOGO-S]  80.77,56.9 0 bottom
LOGO26  SFE_LOGO_NAME_FLAME.1_INCH  [SFE_LOGO_NAME_FLAME_.1]  96.01,55.37 0 bottom
LOGO27  SFE_LOGO_NAME_FLAME.1_INCH  [SFE_LOGO_NAME_FLAME_.1]  84.2,55.37 0 top
LOGO28  OSHW-LOGOS  [OSHW-LOGO-S]  80.77,56.9 0 top
LOGO29  OSHW-LOGOS  [OSHW-LOGO-S]  113.79,56.9 0 bottom
LOGO30  SFE_LOGO_NAME_FLAME.1_INCH  [SFE_LOGO_NAME_FLAME_.1]  129.03,55.37 0 bottom
LOGO31  SFE_LOGO_NAME_FLAME.1_INCH  [SFE_LOGO_NAME_FLAME_.1]  117.22,55.37 0 top
LOGO32  OSHW-LOGOS  [OSHW-LOGO-S]  113.79,56.9 0 top
LOGO33  OSHW-LOGOS  [OSHW-LOGO-S]  160.53,8.64 0 bottom
LOGO34  SFE_LOGO_NAME_FLAME.1_INCH  [SFE_LOGO_NAME_FLAME_.1]  175.77,7.11 0 bottom
LOGO35  SFE_LOGO_NAME_FLAME.1_INCH  [SFE_LOGO_NAME_FLAME_.1]  163.96,7.11 0 top
LOGO36  OSHW-LOGOS  [OSHW-LOGO-S]  160.53,8.64 0 top
LOGO37  OSHW-LOGOS  [OSHW-LOGO-S]  193.55,8.64 0 bottom
LOGO38  SFE_LOGO_NAME_FLAME.1_INCH  [SFE_LOGO_NAME_FLAME_.1]  208.79,7.11 0 bottom
LOGO39  SFE_LOGO_NAME_FLAME.1_INCH  [SFE_LOGO_NAME_FLAME_.1]  196.98,7.11 0 top
LOGO40  OSHW-LOGOS  [OSHW-LOGO-S]  193.55,8.64 0 top
LOGO41  OSHW-LOGOS  [OSHW-LOGO-S]  226.57,8.64 0 bottom
LOGO42  SFE_LOGO_NAME_FLAME.1_INCH  [SFE_LOGO_NAME_FLAME_.1]  241.81,7.11 0 bottom
LOGO43  SFE_LOGO_NAME_FLAME.1_INCH  [SFE_LOGO_NAME_FLAME_.1]  230,7.11 0 top
LOGO44  OSHW-LOGOS  [OSHW-LOGO-S]  226.57,8.64 0 top
LOGO45  OSHW-LOGOS  [OSHW-LOGO-S]  259.59,8.64 0 bottom
LOGO46  SFE_LOGO_NAME_FLAME.1_INCH  [SFE_LOGO_NAME_FLAME_.1]  274.83,7.11 0 bottom
LOGO47  SFE_LOGO_NAME_FLAME.1_INCH  [SFE_LOGO_NAME_FLAME_.1]  263.02,7.11 0 top
LOGO48  OSHW-LOGOS  [OSHW-LOGO-S]  259.59,8.64 0 top
LOGO49  OSHW-LOGOS  [OSHW-LOGO-S]  160.53,56.9 0 bottom
LOGO50  SFE_LOGO_NAME_FLAME.1_INCH  [SFE_LOGO_NAME_FLAME_.1]  175.77,55.37 0 bottom
LOGO51  SFE_LOGO_NAME_FLAME.1_INCH  [SFE_LOGO_NAME_FLAME_.1]  163.96,55.37 0 top
LOGO52  OSHW-LOGOS  [OSHW-LOGO-S]  160.53,56.9 0 top
LOGO53  OSHW-LOGOS  [OSHW-LOGO-S]  193.55,56.9 0 bottom
LOGO54  SFE_LOGO_NAME_FLAME.1_INCH  [SFE_LOGO_NAME_FLAME_.1]  208.79,55.37 0 bottom
LOGO55  SFE_LOGO_NAME_FLAME.1_INCH  [SFE_LOGO_NAME_FLAME_.1]  196.98,55.37 0 top
LOGO56  OSHW-LOGOS  [OSHW-LOGO-S]  193.55,56.9 0 top
LOGO57  OSHW-LOGOS  [OSHW-LOGO-S]  226.57,56.9 0 bottom
LOGO58  SFE_LOGO_NAME_FLAME.1_INCH  [SFE_LOGO_NAME_FLAME_.1]  241.81,55.37 0 bottom
LOGO59  SFE_LOGO_NAME_FLAME.1_INCH  [SFE_LOGO_NAME_FLAME_.1]  230,55.37 0 top
LOGO60  OSHW-LOGOS  [OSHW-LOGO-S]  226.57,56.9 0 top
LOGO61  OSHW-LOGOS  [OSHW-LOGO-S]  259.59,56.9 0 bottom
LOGO62  SFE_LOGO_NAME_FLAME.1_INCH  [SFE_LOGO_NAME_FLAME_.1]  274.83,55.37 0 bottom
LOGO63  SFE_LOGO_NAME_FLAME.1_INCH  [SFE_LOGO_NAME_FLAME_.1]  263.02,55.37 0 top
LOGO64  OSHW-LOGOS  [OSHW-LOGO-S]  259.59,56.9 0 top
LOGO65  OSHW-LOGOS  [OSHW-LOGO-S]  14.73,118.87 0 bottom
LOGO66  SFE_LOGO_NAME_FLAME.1_INCH  [SFE_LOGO_NAME_FLAME_.1]  29.97,117.35 0 bottom
LOGO67  SFE_LOGO_NAME_FLAME.1_INCH  [SFE_LOGO_NAME_FLAME_.1]  18.16,117.35 0 top
LOGO68  OSHW-LOGOS  [OSHW-LOGO-S]  14.73,118.87 0 top
LOGO69  OSHW-LOGOS  [OSHW-LOGO-S]  47.75,118.87 0 bottom
LOGO70  SFE_LOGO_NAME_FLAME.1_INCH  [SFE_LOGO_NAME_FLAME_.1]  62.99,117.35 0 bottom
LOGO71  SFE_LOGO_NAME_FLAME.1_INCH  [SFE_LOGO_NAME_FLAME_.1]  51.18,117.35 0 top
LOGO72  OSHW-LOGOS  [OSHW-LOGO-S]  47.75,118.87 0 top
LOGO73  OSHW-LOGOS  [OSHW-LOGO-S]  80.77,118.87 0 bottom
LOGO74  SFE_LOGO_NAME_FLAME.1_INCH  [SFE_LOGO_NAME_FLAME_.1]  96.01,117.35 0 bottom
LOGO75  SFE_LOGO_NAME_FLAME.1_INCH  [SFE_LOGO_NAME_FLAME_.1]  84.2,117.35 0 top
LOGO76  OSHW-LOGOS  [OSHW-LOGO-S]  80.77,118.87 0 top
LOGO77  OSHW-LOGOS  [OSHW-LOGO-S]  113.79,118.87 0 bottom
LOGO78  SFE_LOGO_NAME_FLAME.1_INCH  [SFE_LOGO_NAME_FLAME_.1]  129.03,117.35 0 bottom
LOGO79  SFE_LOGO_NAME_FLAME.1_INCH  [SFE_LOGO_NAME_FLAME_.1]  117.22,117.35 0 top
LOGO80  OSHW-LOGOS  [OSHW-LOGO-S]  113.79,118.87 0 top
LOGO81  OSHW-LOGOS  [OSHW-LOGO-S]  14.73,167.13 0 bottom
LOGO82  SFE_LOGO_NAME_FLAME.1_INCH  [SFE_LOGO_NAME_FLAME_.1]  29.97,165.61 0 bottom
LOGO83  SFE_LOGO_NAME_FLAME.1_INCH  [SFE_LOGO_NAME_FLAME_.1]  18.16,165.61 0 top
LOGO84  OSHW-LOGOS  [OSHW-LOGO-S]  14.73,167.13 0 top
LOGO85  OSHW-LOGOS  [OSHW-LOGO-S]  47.75,167.13 0 bottom
LOGO86  SFE_LOGO_NAME_FLAME.1_INCH  [SFE_LOGO_NAME_FLAME_.1]  62.99,165.61 0 bottom
LOGO87  SFE_LOGO_NAME_FLAME.1_INCH  [SFE_LOGO_NAME_FLAME_.1]  51.18,165.61 0 top
LOGO88  OSHW-LOGOS  [OSHW-LOGO-S]  47.75,167.13 0 top
LOGO89  OSHW-LOGOS  [OSHW-LOGO-S]  80.77,167.13 0 bottom
LOGO90  SFE_LOGO_NAME_FLAME.1_INCH  [SFE_LOGO_NAME_FLAME_.1]  96.01,165.61 0 bottom
LOGO91  SFE_LOGO_NAME_FLAME.1_INCH  [SFE_LOGO_NAME_FLAME_.1]  84.2,165.61 0 top
LOGO92  OSHW-LOGOS  [OSHW-LOGO-S]  80.77,167.13 0 top
LOGO93  OSHW-LOGOS  [OSHW-LOGO-S]  113.79,167.13 0 bottom
LOGO94  SFE_LOGO_NAME_FLAME.1_INCH  [SFE_LOGO_NAME_FLAME_.1]  129.03,165.61 0 bottom
LOGO95  SFE_LOGO_NAME_FLAME.1_INCH  [SFE_LOGO_NAME_FLAME_.1]  117.22,165.61 0 top
LOGO96  OSHW-LOGOS  [OSHW-LOGO-S]  113.79,167.13 0 top
LOGO97  OSHW-LOGOS  [OSHW-LOGO-S]  160.53,118.87 0 bottom
LOGO98  SFE_LOGO_NAME_FLAME.1_INCH  [SFE_LOGO_NAME_FLAME_.1]  175.77,117.35 0 bottom
LOGO99  SFE_LOGO_NAME_FLAME.1_INCH  [SFE_LOGO_NAME_FLAME_.1]  163.96,117.35 0 top
LOGO100  OSHW-LOGOS  [OSHW-LOGO-S]  160.53,118.87 0 top
LOGO101  OSHW-LOGOS  [OSHW-LOGO-S]  193.55,118.87 0 bottom
LOGO102  SFE_LOGO_NAME_FLAME.1_INCH  [SFE_LOGO_NAME_FLAME_.1]  208.79,117.35 0 bottom
LOGO103  SFE_LOGO_NAME_FLAME.1_INCH  [SFE_LOGO_NAME_FLAME_.1]  196.98,117.35 0 top
LOGO104  OSHW-LOGOS  [OSHW-LOGO-S]  193.55,118.87 0 top
LOGO105  OSHW-LOGOS  [OSHW-LOGO-S]  226.57,118.87 0 bottom
LOGO106  SFE_LOGO_NAME_FLAME.1_INCH  [SFE_LOGO_NAME_FLAME_.1]  241.81,117.35 0 bottom
LOGO107  SFE_LOGO_NAME_FLAME.1_INCH  [SFE_LOGO_NAME_FLAME_.1]  230,117.35 0 top
LOGO108  OSHW-LOGOS  [OSHW-LOGO-S]  226.57,118.87 0 top
LOGO109  OSHW-LOGOS  [OSHW-LOGO-S]  259.59,118.87 0 bottom
LOGO110  SFE_LOGO_NAME_FLAME.1_INCH  [SFE_LOGO_NAME_FLAME_.1]  274.83,117.35 0 bottom
LOGO111  SFE_LOGO_NAME_FLAME.1_INCH  [SFE_LOGO_NAME_FLAME_.1]  263.02,117.35 0 top
LOGO112  OSHW-LOGOS  [OSHW-LOGO-S]  259.59,118.87 0 top
LOGO113  OSHW-LOGOS  [OSHW-LOGO-S]  160.53,167.13 0 bottom
LOGO114  SFE_LOGO_NAME_FLAME.1_INCH  [SFE_LOGO_NAME_FLAME_.1]  175.77,165.61 0 bottom
LOGO115  SFE_LOGO_NAME_FLAME.1_INCH  [SFE_LOGO_NAME_FLAME_.1]  163.96,165.61 0 top
LOGO116  OSHW-LOGOS  [OSHW-LOGO-S]  160.53,167.13 0 top
LOGO117  OSHW-LOGOS  [OSHW-LOGO-S]  193.55,167.13 0 bottom
LOGO118  SFE_LOGO_NAME_FLAME.1_INCH  [SFE_LOGO_NAME_FLAME_.1]  208.79,165.61 0 bottom
LOGO119  SFE_LOGO_NAME_FLAME.1_INCH  [SFE_LOGO_NAME_FLAME_.1]  196.98,165.61 0 top
LOGO120  OSHW-LOGOS  [OSHW-LOGO-S]  193.55,167.13 0 top
LOGO121  OSHW-LOGOS  [OSHW-LOGO-S]  226.57,167.13 0 bottom
LOGO122  SFE_LOGO_NAME_FLAME.1_INCH  [SFE_LOGO_NAME_FLAME_.1]  241.81,165.61 0 bottom
LOGO123  SFE_LOGO_NAME_FLAME.1_INCH  [SFE_LOGO_NAME_FLAME_.1]  230,165.61 0 top
LOGO124  OSHW-LOGOS  [OSHW-LOGO-S]  226.57,167.13 0 top
LOGO125  OSHW-LOGOS  [OSHW-LOGO-S]  259.59,167.13 0 bottom
LOGO126  SFE_LOGO_NAME_FLAME.1_INCH  [SFE_LOGO_NAME_FLAME_.1]  274.83,165.61 0 bottom
LOGO127  SFE_LOGO_NAME_FLAME.1_INCH  [SFE_LOGO_NAME_FLAME_.1]  263.02,165.61 0 top
LOGO128  OSHW-LOGOS  [OSHW-LOGO-S]  259.59,167.13 0 top
Q1  BSS138  [SOT23-3]  14.61,20.19 90 top
Q2  BSS138  [SOT23-3]  47.62,20.19 90 top
Q3  BSS138  [SOT23-3]  80.64,20.19 90 top
Q4  BSS138  [SOT23-3]  113.67,20.19 90 top
Q5  BSS138  [SOT23-3]  14.61,68.45 90 top
Q6  BSS138  [SOT23-3]  47.62,68.45 90 top
Q7  BSS138  [SOT23-3]  80.64,68.45 90 top
Q8  BSS138  [SOT23-3]  113.67,68.45 90 top
Q9  BSS138  [SOT23-3]  160.4,20.19 90 top
Q10  BSS138  [SOT23-3]  193.42,20.19 90 top
Q11  BSS138  [SOT23-3]  226.44,20.19 90 top
Q12  BSS138  [SOT23-3]  259.46,20.19 90 top
Q13  BSS138  [SOT23-3]  160.4,68.45 90 top
Q14  BSS138  [SOT23-3]  193.42,68.45 90 top
Q15  BSS138  [SOT23-3]  226.44,68.45 90 top
Q16  BSS138  [SOT23-3]  259.46,68.45 90 top
Q17  BSS138  [SOT23-3]  14.61,130.43 90 top
Q18  BSS138  [SOT23-3]  47.62,130.43 90 top
Q19  BSS138  [SOT23-3]  80.64,130.43 90 top
Q20  BSS138  [SOT23-3]  113.67,130.43 90 top
Q21  BSS138  [SOT23-3]  14.61,178.69 90 top
Q22  BSS138  [SOT23-3]  47.62,178.69 90 top
Q23  BSS138  [SOT23-3]  80.64,178.69 90 top
Q24  BSS138  [SOT23-3]  113.67,178.69 90 top
Q25  BSS138  [SOT23-3]  160.4,130.43 90 top
Q26  BSS138  [SOT23-3]  193.42,130.43 90 top
Q27  BSS138  [SOT23-3]  226.44,130.43 90 top
Q28  BSS138  [SOT23-3]  259.46,130.43 90 top
Q29  BSS138  [SOT23-3]  160.4,178.69 90 top
Q30  BSS138  [SOT23-3]  193.42,178.69 90 top
Q31  BSS138  [SOT23-3]  226.44,178.69 90 top
Q32  BSS138  [SOT23-3]  259.46,178.69 90 top
R1  1K  [0603-RES]  44.45,45.34 270 top
R2  10K  [0603-RES]  46.48,37.34 270 top
R3  22  [0603-RES]  46.48,33.78 90 top
R4  680k  [0603-RES]  57.66,18.03 90 top
R5  1K  [0603-RES]  11.43,45.34 270 top
R6  120k  [0603-RES]  57.66,14.73 90 top
R7  1K  [0603-RES]  49.78,16.89 270 top
R8  10K  [0603-RES]  13.46,37.34 270 top
R9  22  [0603-RES]  13.46,33.78 90 top
R10  1K  [0603-RES]  77.47,45.34 270 top
R11  10K  [0603-RES]  79.5,37.34 270 top
R12  22  [0603-RES]  79.5,33.78 90 top
R13  680k  [0603-RES]  24.64,18.03 90 top
R14  120k  [0603-RES]  24.64,14.73 90 top
R15  1K  [0603-RES]  16.76,16.89 270 top
R16  680k  [0603-RES]  90.68,18.03 90 top
R17  120k  [0603-RES]  90.68,14.73 90 top
R18  1K  [0603-RES]  82.8,16.89 270 top
R19  1K  [0603-RES]  110.49,45.34 270 top
R20  10K  [0603-RES]  112.52,37.34 270 top
R21  22  [0603-RES]  112.52,33.78 90 top
R22  680k  [0603-RES]  123.7,18.03 90 top
R23  120k  [0603-RES]  123.7,14.73 90 top
R24  1K  [0603-RES]  115.82,16.89 270 top
R25  1K  [0603-RES]  11.43,93.6 270 top
R26  10K  [0603-RES]  13.46,85.6 270 top
R27  22  [0603-RES]  13.46,82.04 90 top
R28  680k  [0603-RES]  24.64,66.29 90 top
R29  120k  [0603-RES]  24.64,62.99 90 top
R30  1K  [0603-RES]  16.76,65.15 270 top
R31  1K  [0603-RES]  44.45,93.6 270 top
R32  10K  [0603-RES]  46.48,85.6 270 top
R33  22  [0603-RES]  46.48,82.04 90 top
R34  680k  [0603-RES]  57.66,66.29 90 top
R35  120k  [0603-RES]  57.66,62.99 90 top
R36  1K  [0603-RES]  49.78,65.15 270 top
R37  1K  [0603-RES]  77.47,93.6 270 top
R38  10K  [0603-RES]  79.5,85.6 270 top
R39  22  [0603-RES]  79.5,82.04 90 top
R40  680k  [0603-RES]  90.68,66.29 90 top
R41  120k  [0603-RES]  90.68,62.99 90 top
R42  1K  [0603-RES]  82.8,65.15 270 top
R43  1K  [0603-RES]  110.49,93.6 270 top
R44  10K  [0603-RES]  112.52,85.6 270 top
R45  22  [0603-RES]  112.52,82.04 90 top
R46  680k  [0603-RES]  123.7,66.29 90 top
R47  120k  [0603-RES]  123.7,62.99 90 top
R48  1K  [0603-RES]  115.82,65.15 270 top
R49  1K  [0603-RES]  157.23,45.34 270 top
R50  10K  [0603-RES]  159.26,37.34 270 top
R51  22  [0603-RES]  159.26,33.78 90 top
R52  680k  [0603-RES]  170.43,18.03 90 top
R53  120k  [0603-RES]  170.43,14.73 90 top
R54  1K  [0603-RES]  162.56,16.89 270 top
R55  1K  [0603-RES]  190.25,45.34 270 top
R56  10K  [0603-RES]  192.28,37.34 270 top
R57  22  [0603-RES]  192.28,33.78 90 top
R58  680k  [0603-RES]  203.45,18.03 90 top
R59  120k  [0603-RES]  203.45,14.73 90 top
R60  1K  [0603-RES]  195.58,16.89 270 top
R61  1K  [0603-RES]  223.27,45.34 270 top
R62  10K  [0603-RES]  225.3,37.34 270 top
R63  22  [0603-RES]  225.3,33.78 90 top
R64  680k  [0603-RES]  236.47,18.03 90 top
R65  120k  [0603-RES]  236.47,14.73 90 top
R66  1K  [0603-RES]  228.6,16.89 270 top
R67  1K  [0603-RES]  256.29,45.34 270 top
R68  10K  [0603-RES]  258.32,37.34 270 top
R69  22  [0603-RES]  258.32,33.78 90 top
R70  680k  [0603-RES]  269.49,18.03 90 top
R71  120k  [0603-RES]  269.49,14.73 90 top
R72  1K  [0603-RES]  261.62,16.89 270 top
R73  1K  [0603-RES]  157.23,93.6 270 top
R74  10K  [0603-RES]  159.26,85.6 270 top
R75  22  [0603-RES]  159.26,82.04 90 top
R76  680k  [0603-RES]  170.43,66.29 90 top
R77  120k  [0603-RES]  170.43,62.99 90 top
R78  1K  [0603-RES]  162.56,65.15 270 top
R79  1K  [0603-RES]  190.25,93.6 270 top
R80  10K  [0603-RES]  192.28,85.6 270 top
R81  22  [0603-RES]  192.28,82.04 90 top
R82  680k  [0603-RES]  203.45,66.29 90 top
R83  120k  [0603-RES]  203.45,62.99 90 top
R84  1K  [0603-RES]  195.58,65.15 270 top
R85  1K  [0603-RES]  223.27,93.6 270 top
R86  10K  [0603-RES]  225.3,85.6 270 top
R87  22  [0603-RES]  225.3,82.04 90 top
R88  680k  [0603-RES]  236.47,66.29 90 top
R89  120k  [0603-RES]  236.47,62.99 90 top
R90  1K  [0603-RES]  228.6,65.15 270 top
R91  1K  [0603-RES]  256.29,93.6 270 top
R92  10K  [0603-RES]  258.32,85.6 270 top
R93  22  [0603-RES]  258.32,82.04 90 top
R94  680k  [0603-RES]  269.49,66.29 90 top
R95  120k  [0603-RES]  269.49,62.99 90 top
R96  1K  [0603-RES]  261.62,65.15 270 top
R97  1K  [0603-RES]  11.43,155.57 270 top
R98  10K  [0603-RES]  13.46,147.57 270 top
R99  22  [0603-RES]  13.46,144.02 90 top
R100  680k  [0603-RES]  24.64,128.27 90 top
R101  120k  [0603-RES]  24.64,124.97 90 top
R102  1K  [0603-RES]  16.76,127.13 270 top
R103  1K  [0603-RES]  44.45,155.57 270 top
R104  10K  [0603-RES]  46.48,147.57 270 top
R105  22  [0603-RES]  46.48,144.02 90 top
R106  680k  [0603-RES]  57.66,128.27 90 top
R107  120k  [0603-RES]  57.66,124.97 90 top
R108  1K  [0603-RES]  49.78,127.13 270 top
R109  1K  [0603-RES]  77.47,155.57 270 top
R110  10K  [0603-RES]  79.5,147.57 270 top
R111  22  [0603-RES]  79.5,144.02 90 top
R112  680k  [0603-RES]  90.68,128.27 90 top
R113  120k  [0603-RES]  90.68,124.97 90 top
R114  1K  [0603-RES]  82.8,127.13 270 top
R115  1K  [0603-RES]  110.49,155.57 270 top
R116  10K  [0603-RES]  112.52,147.57 270 top
R117  22  [0603-RES]  112.52,144.02 90 top
R118  680k  [0603-RES]  123.7,128.27 90 top
R119  120k  [0603-RES]  123.7,124.97 90 top
R120  1K  [0603-RES]  115.82,127.13 270 top
R121  1K  [0603-RES]  11.43,203.84 270 top
R122  10K  [0603-RES]  13.46,195.83 270 top
R123  22  [0603-RES]  13.46,192.28 90 top
R124  680k  [0603-RES]  24.64,176.53 90 top
R125  120k  [0603-RES]  24.64,173.23 90 top
R126  1K  [0603-RES]  16.76,175.39 270 top
R127  1K  [0603-RES]  44.45,203.84 270 top
R128  10K  [0603-RES]  46.48,195.83 270 top
R129  22  [0603-RES]  46.48,192.28 90 top
R130  680k  [0603-RES]  57.66,176.53 90 top
R131  120k  [0603-RES]  57.66,173.23 90 top
R132  1K  [0603-RES]  49.78,175.39 270 top
R133  1K  [0603-RES]  77.47,203.84 270 top
R134  10K  [0603-RES]  79.5,195.83 270 top
R135  22  [0603-RES]  79.5,192.28 90 top
R136  680k  [0603-RES]  90.68,176.53 90 top
R137  120k  [0603-RES]  90.68,173.23 90 top
R138  1K  [0603-RES]  82.8,175.39 270 top
R139  1K  [0603-RES]  110.49,203.84 270 top
R140  10K  [0603-RES]  112.52,195.83 270 top
R141  22  [0603-RES]  112.52,192.28 90 top
R142  680k  [0603-RES]  123.7,176.53 90 top
R143  120k  [0603-RES]  123.7,173.23 90 top
R144  1K  [0603-RES]  115.82,175.39 270 top
R145  1K  [0603-RES]  157.23,155.57 270 top
R146  10K  [0603-RES]  159.26,147.57 270 top
R147  22  [0603-RES]  159.26,144.02 90 top
R148  680k  [0603-RES]  170.43,128.27 90 top
R149  120k  [0603-RES]  170.43,124.97 90 top
R150  1K  [0603-RES]  162.56,127.13 270 top
R151  1K  [0603-RES]  190.25,155.57 270 top
R152  10K  [0603-RES]  192.28,147.57 270 top
R153  22  [0603-RES]  192.28,144.02 90 top
R154  680k  [0603-RES]  203.45,128.27 90 top
R155  120k  [0603-RES]  203.45,124.97 90 top
R156  1K  [0603-RES]  195.58,127.13 270 top
R157  1K  [0603-RES]  223.27,155.57 270 top
R158  10K  [0603-RES]  225.3,147.57 270 top
R159  22  [0603-RES]  225.3,144.02 90 top
R160  680k  [0603-RES]  236.47,128.27 90 top
R161  120k  [0603-RES]  236.47,124.97 90 top
R162  1K  [0603-RES]  228.6,127.13 270 top
R163  1K  [0603-RES]  256.29,155.57 270 top
R164  10K  [0603-RES]  258.32,147.57 270 top
R165  22  [0603-RES]  258.32,144.02 90 top
R166  680k  [0603-RES]  269.49,128.27 90 top
R167  120k  [0603-RES]  269.49,124.97 90 top
R168  1K  [0603-RES]  261.62,127.13 270 top
R169  1K  [0603-RES]  157.23,203.84 270 top
R170  10K  [0603-RES]  159.26,195.83 270 top
R171  22  [0603-RES]  159.26,192.28 90 top
R172  680k  [0603-RES]  170.43,176.53 90 top
R173  120k  [0603-RES]  170.43,173.23 90 top
R174  1K  [0603-RES]  162.56,175.39 270 top
R175  1K  [0603-RES]  190.25,203.84 270 top
R176  10K  [0603-RES]  192.28,195.83 270 top
R177  22  [0603-RES]  192.28,192.28 90 top
R178  680k  [0603-RES]  203.45,176.53 90 top
R179  120k  [0603-RES]  203.45,173.23 90 top
R180  1K  [0603-RES]  195.58,175.39 270 top
R181  1K  [0603-RES]  223.27,203.84 270 top
R182  10K  [0603-RES]  225.3,195.83 270 top
R183  22  [0603-RES]  225.3,192.28 90 top
R184  680k  [0603-RES]  236.47,176.53 90 top
R185  120k  [0603-RES]  236.47,173.23 90 top
R186  1K  [0603-RES]  228.6,175.39 270 top
R187  1K  [0603-RES]  256.29,203.84 270 top
R188  10K  [0603-RES]  258.32,195.83 270 top
R189  22  [0603-RES]  258.32,192.28 90 top
R190  680k  [0603-RES]  269.49,176.53 90 top
R191  120k  [0603-RES]  269.49,173.23 90 top
R192  1K  [0603-RES]  261.62,175.39 270 top
S1  POWER  [TACTILE_SWITCH-SMD-RIGHT-ANGLE]  10.67,35.56 270 top
S2  DPDT  [AYZ0202]  24.13,34.54 0 top
S3  POWER  [TACTILE_SWITCH-SMD-RIGHT-ANGLE]  43.69,35.56 270 top
S4  DPDT  [AYZ0202]  57.15,34.54 0 top
S5  POWER  [TACTILE_SWITCH-SMD-RIGHT-ANGLE]  76.71,35.56 270 top
S6  DPDT  [AYZ0202]  90.17,34.54 0 top
S7  POWER  [TACTILE_SWITCH-SMD-RIGHT-ANGLE]  109.73,35.56 270 top
S8  DPDT  [AYZ0202]  123.19,34.54 0 top
S9  POWER  [TACTILE_SWITCH-SMD-RIGHT-ANGLE]  10.67,83.82 270 top
S10  DPDT  [AYZ0202]  24.13,82.8 0 top
S11  POWER  [TACTILE_SWITCH-SMD-RIGHT-ANGLE]  43.69,83.82 270 top
S12  DPDT  [AYZ0202]  57.15,82.8 0 top
S13  POWER  [TACTILE_SWITCH-SMD-RIGHT-ANGLE]  76.71,83.82 270 top
S14  DPDT  [AYZ0202]  90.17,82.8 0 top
S15  POWER  [TACTILE_SWITCH-SMD-RIGHT-ANGLE]  109.73,83.82 270 top
S16  DPDT  [AYZ0202]  123.19,82.8 0 top
S17  POWER  [TACTILE_SWITCH-SMD-RIGHT-ANGLE]  156.46,35.56 270 top
S18  DPDT  [AYZ0202]  169.93,34.54 0 top
S19  POWER  [TACTILE_SWITCH-SMD-RIGHT-ANGLE]  189.48,35.56 270 top
S20  DPDT  [AYZ0202]  202.95,34.54 0 top
S21  POWER  [TACTILE_SWITCH-SMD-RIGHT-ANGLE]  222.5,35.56 270 top
S22  DPDT  [AYZ0202]  235.97,34.54 0 top
S23  POWER  [TACTILE_SWITCH-SMD-RIGHT-ANGLE]  255.52,35.56 270 top
S24  DPDT  [AYZ0202]  268.99,34.54 0 top
S25  POWER  [TACTILE_SWITCH-SMD-RIGHT-ANGLE]  156.46,83.82 270 top
S26  DPDT  [AYZ0202]  169.93,82.8 0 top
S27  POWER  [TACTILE_SWITCH-SMD-RIGHT-ANGLE]  189.48,83.82 270 top
S28  DPDT  [AYZ0202]  202.95,82.8 0 top
S29  POWER  [TACTILE_SWITCH-SMD-RIGHT-ANGLE]  222.5,83.82 270 top
S30  DPDT  [AYZ0202]  235.97,82.8 0 top
S31  POWER  [TACTILE_SWITCH-SMD-RIGHT-ANGLE]  255.52,83.82 270 top
S32  DPDT  [AYZ0202]  268.99,82.8 0 top
S33  POWER  [TACTILE_SWITCH-SMD-RIGHT-ANGLE]  10.67,145.8 270 top
S34  DPDT  [AYZ0202]  24.13,144.78 0 top
S35  POWER  [TACTILE_SWITCH-SMD-RIGHT-ANGLE]  43.69,145.8 270 top
S36  DPDT  [AYZ0202]  57.15,144.78 0 top
S37  POWER  [TACTILE_SWITCH-SMD-RIGHT-ANGLE]  76.71,145.8 270 top
S38  DPDT  [AYZ0202]  90.17,144.78 0 top
S39  POWER  [TACTILE_SWITCH-SMD-RIGHT-ANGLE]  109.73,145.8 270 top
S40  DPDT  [AYZ0202]  123.19,144.78 0 top
S41  POWER  [TACTILE_SWITCH-SMD-RIGHT-ANGLE]  10.67,194.06 270 top
S42  DPDT  [AYZ0202]  24.13,193.04 0 top
S43  POWER  [TACTILE_SWITCH-SMD-RIGHT-ANGLE]  43.69,194.06 270 top
S44  DPDT  [AYZ0202]  57.15,193.04 0 top
S45  POWER  [TACTILE_SWITCH-SMD-RIGHT-ANGLE]  76.71,194.06 270 top
S46  DPDT  [AYZ0202]  90.17,193.04 0 top
S47  POWER  [TACTILE_SWITCH-SMD-RIGHT-ANGLE]  109.73,194.06 270 top
S48  DPDT  [AYZ0202]  123.19,193.04 0 top
S49  POWER  [TACTILE_SWITCH-SMD-RIGHT-ANGLE]  156.46,145.8 270 top
S50  DPDT  [AYZ0202]  169.93,144.78 0 top
S51  POWER  [TACTILE_SWITCH-SMD-RIGHT-ANGLE]  189.48,145.8 270 top
S52  DPDT  [AYZ0202]  202.95,144.78 0 top
S53  POWER  [TACTILE_SWITCH-SMD-RIGHT-ANGLE]  222.5,145.8 270 top
S54  DPDT  [AYZ0202]  235.97,144.78 0 top
S55  POWER  [TACTILE_SWITCH-SMD-RIGHT-ANGLE]  255.52,145.8 270 top
S56  DPDT  [AYZ0202]  268.99,144.78 0 top
S57  POWER  [TACTILE_SWITCH-SMD-RIGHT-ANGLE]  156.46,194.06 270 top
S58  DPDT  [AYZ0202]  169.93,193.04 0 top